# Altium PCB IR_Sensor.PcbDoc
Units mil, origin at the board's own origin, x right, y up, seen from the top; angles counter-clockwise.
Board outline 1596.57 x 1682.66 mil, 4 copper layers (Top Layer, GND, PWR, Bottom Layer), stack 61.583 mil thick; 53 components, 41 nets, 214 pads, 265 vias.
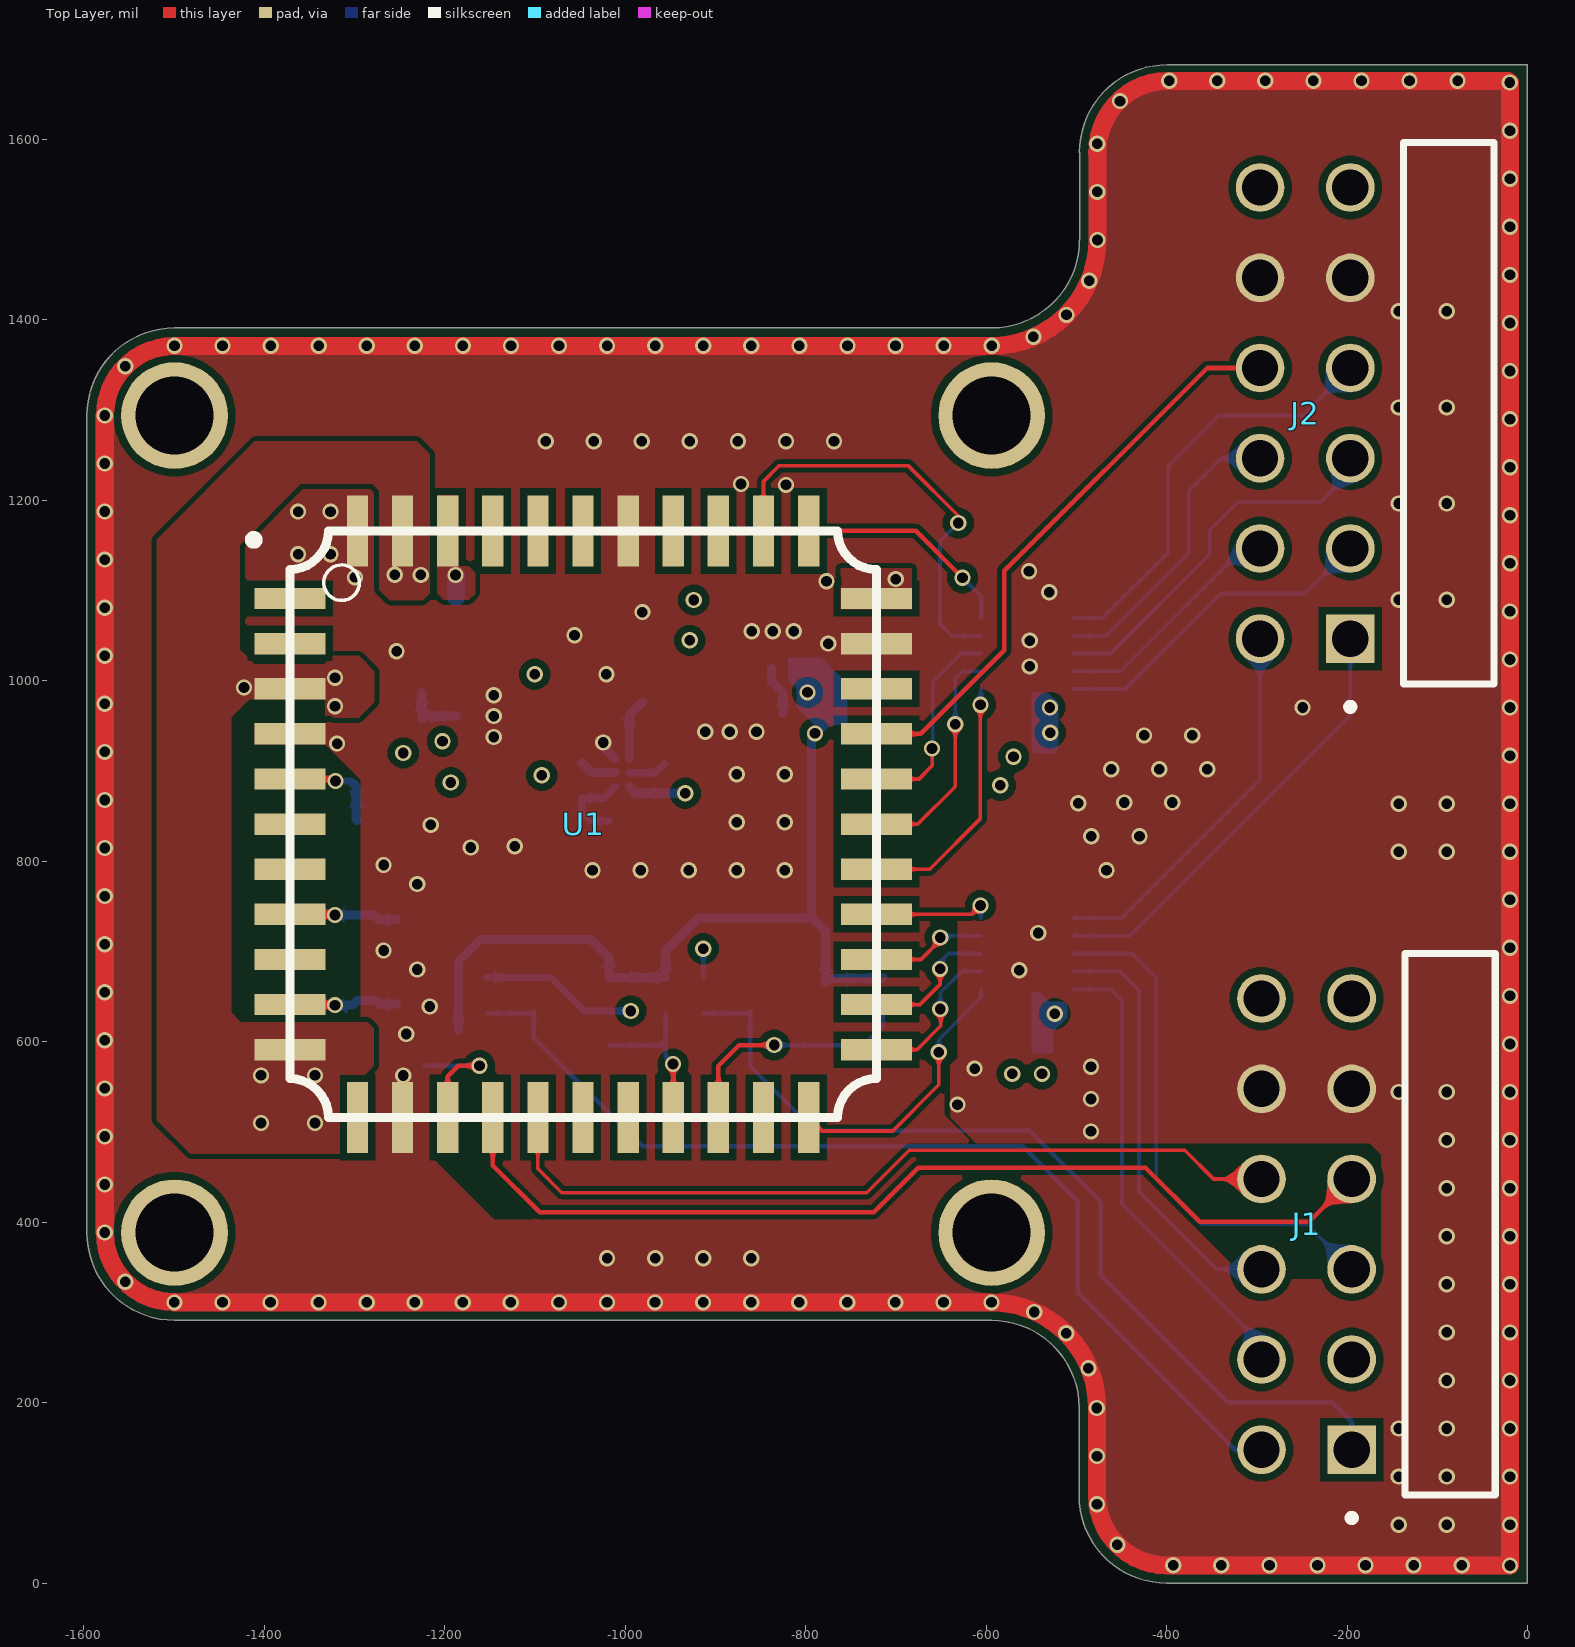
[diagram p0: Top Layer view]
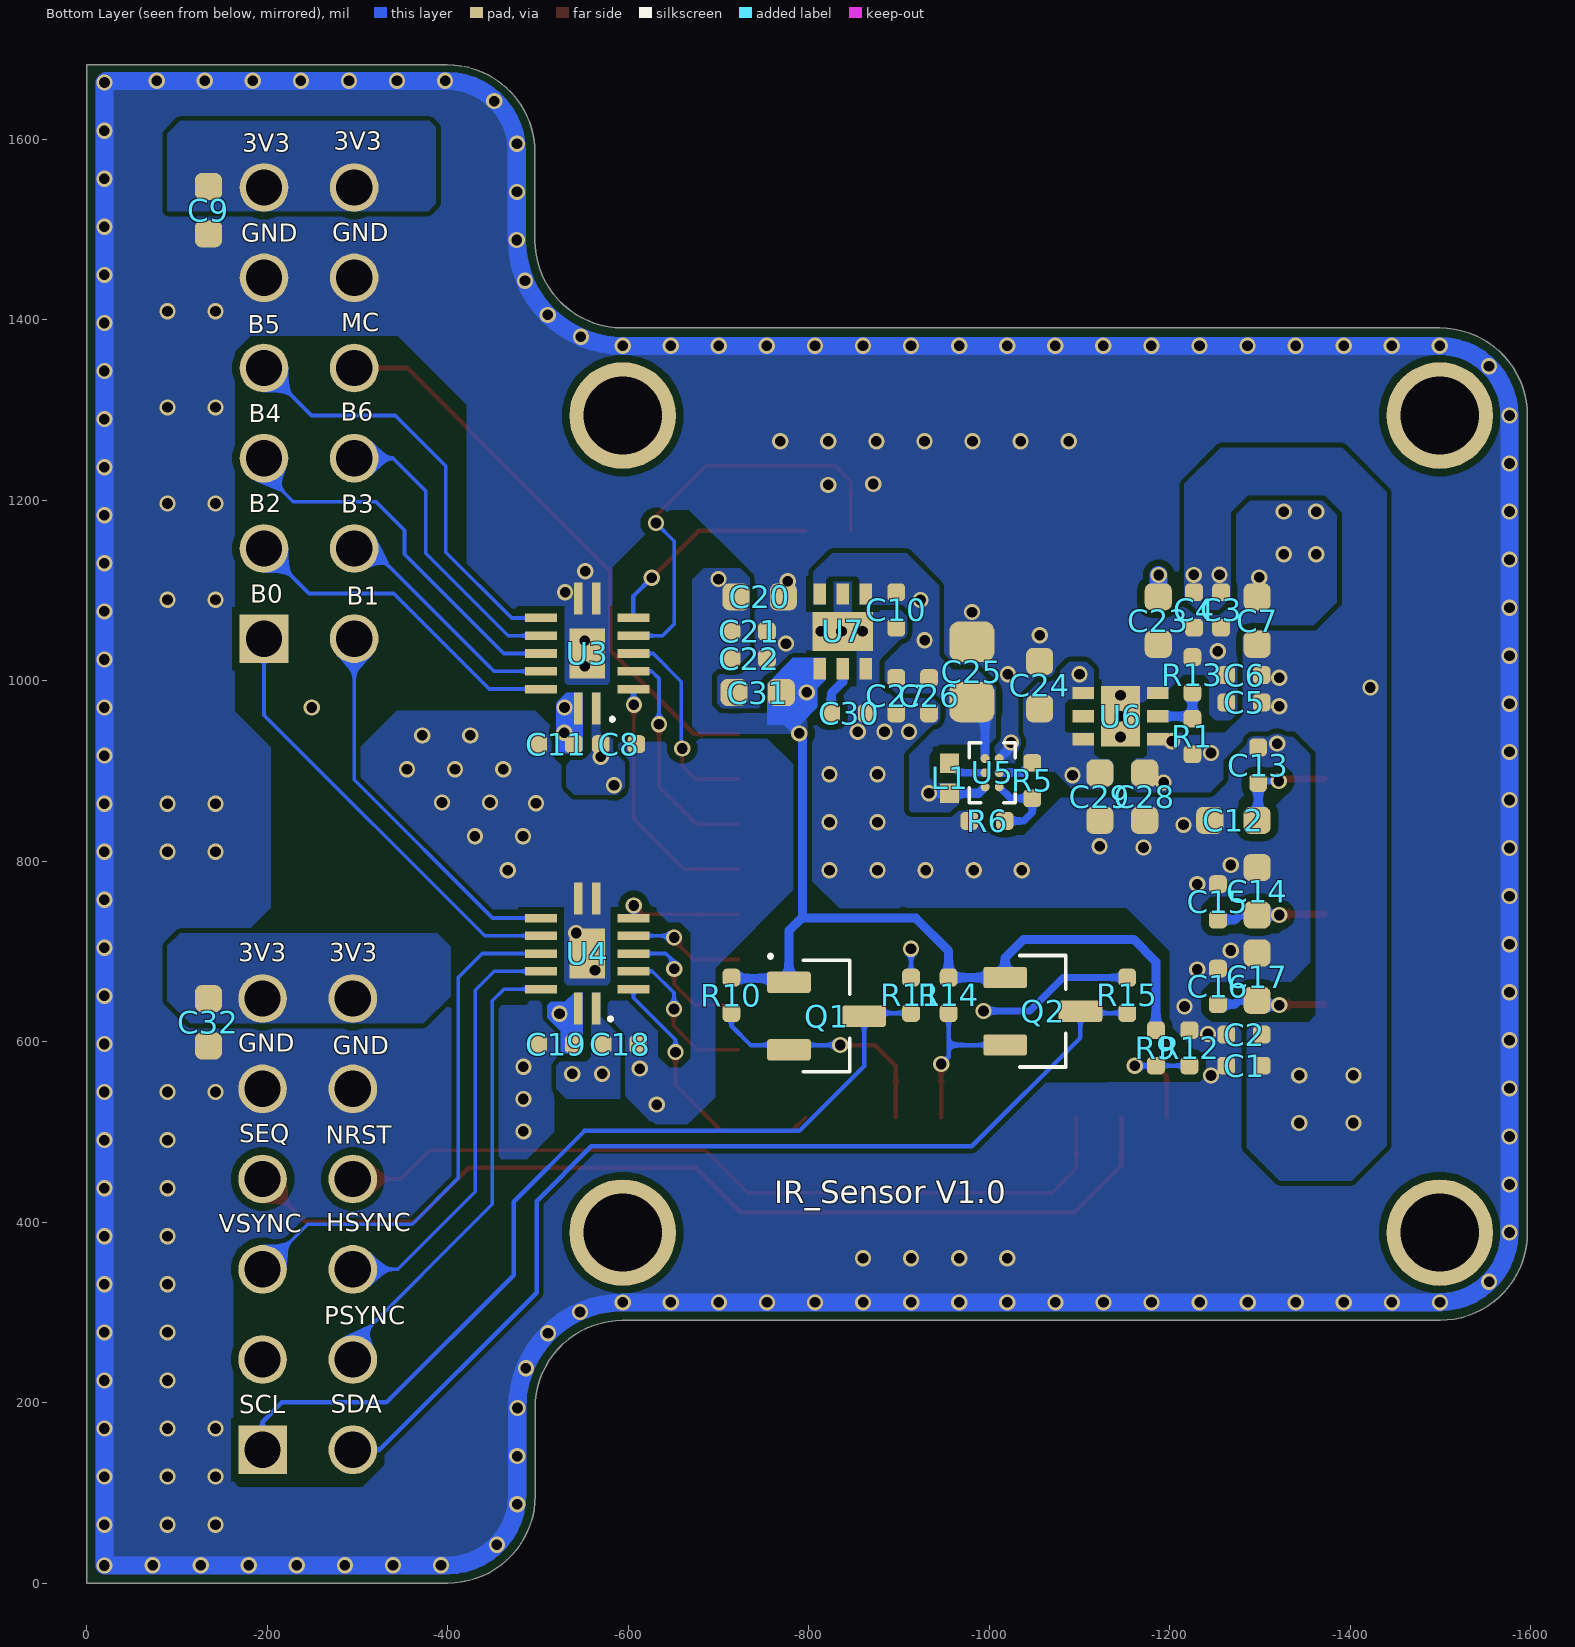
[diagram p1: Bottom Layer view, seen from below]
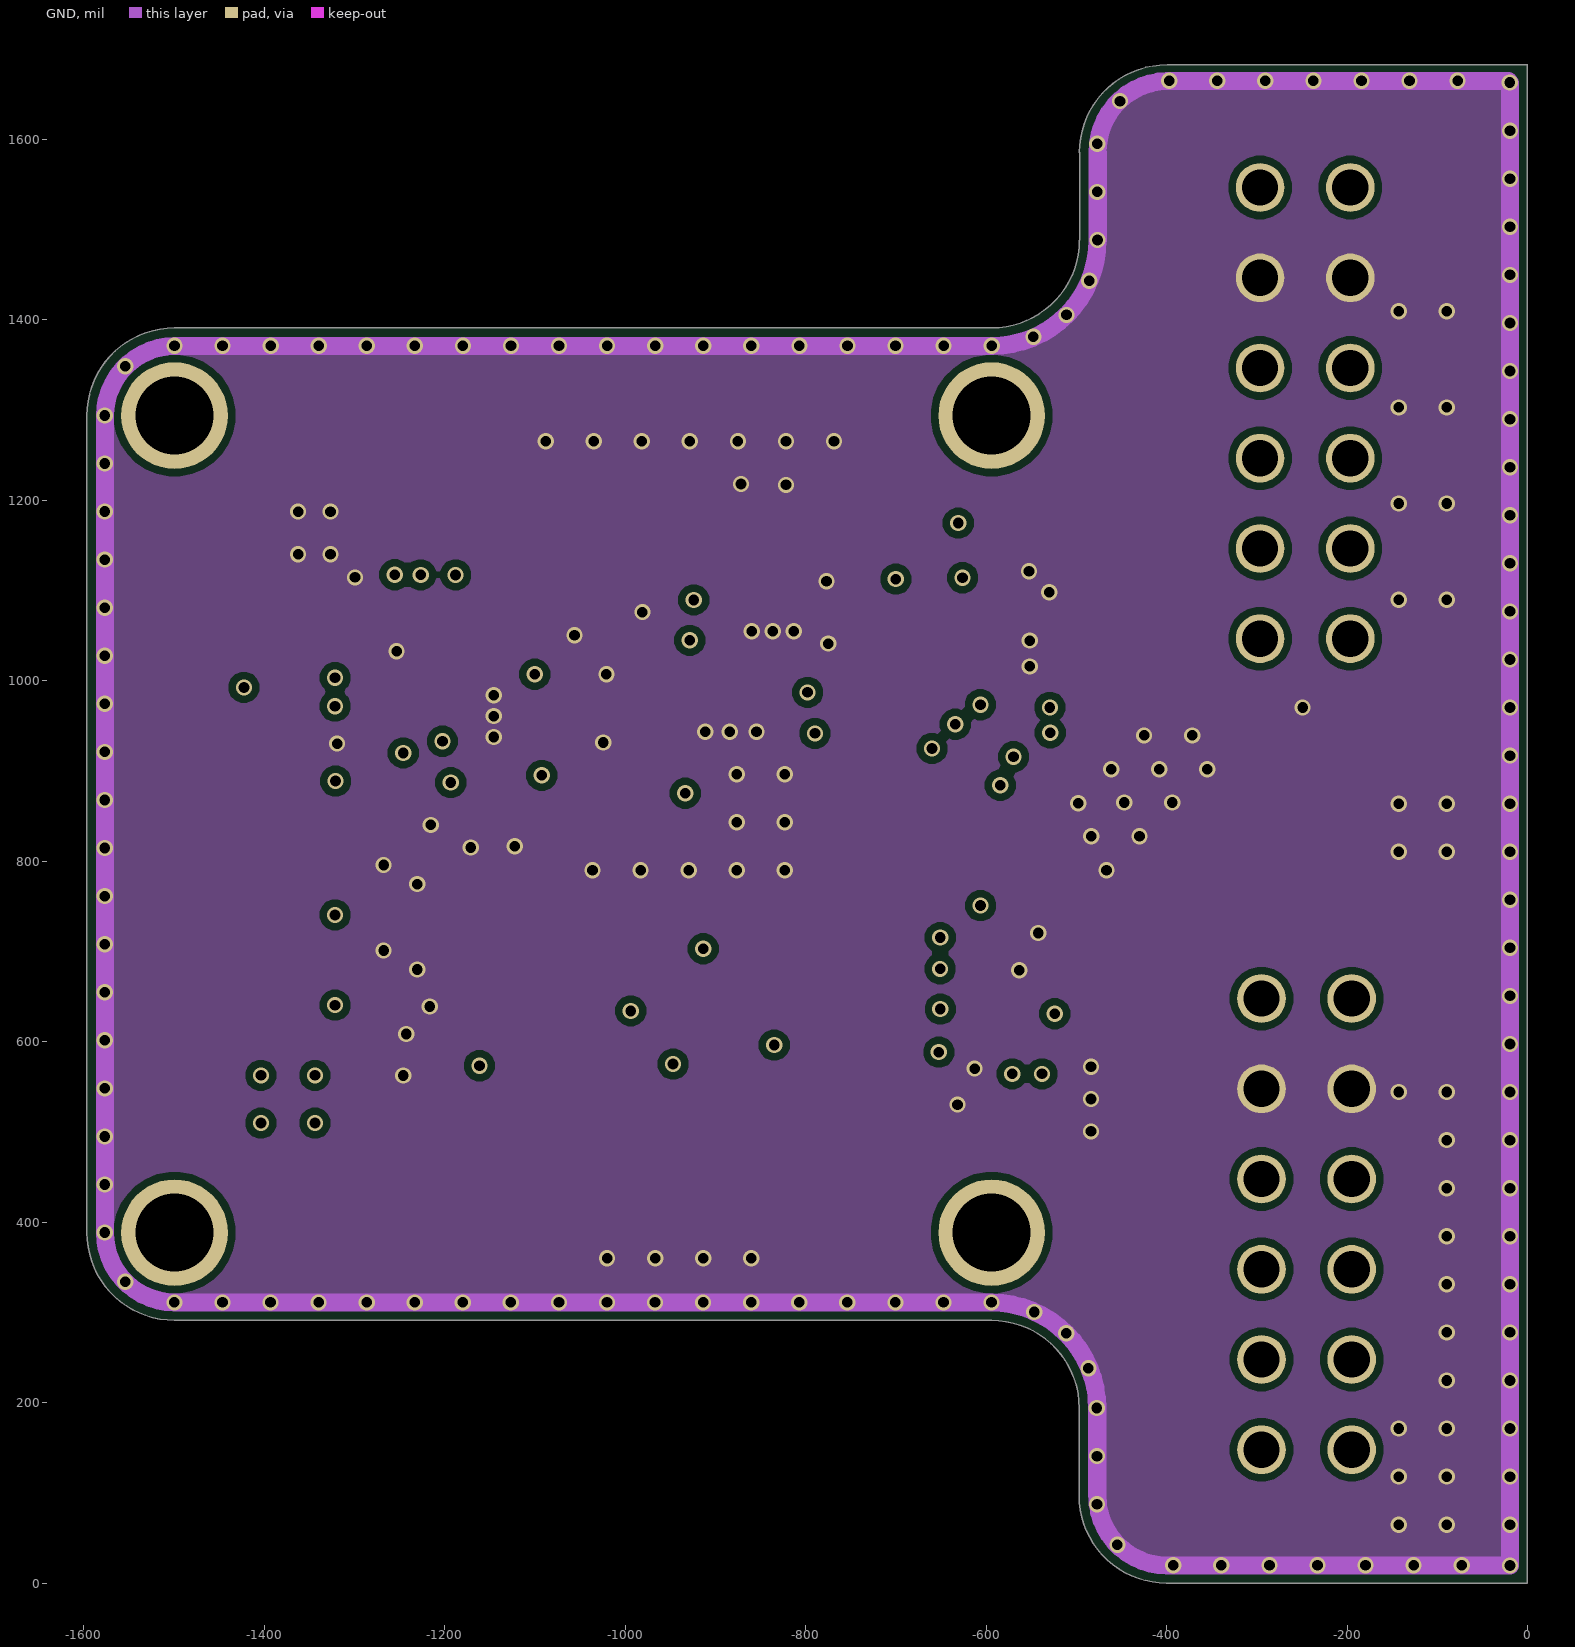
[diagram p2: GND]
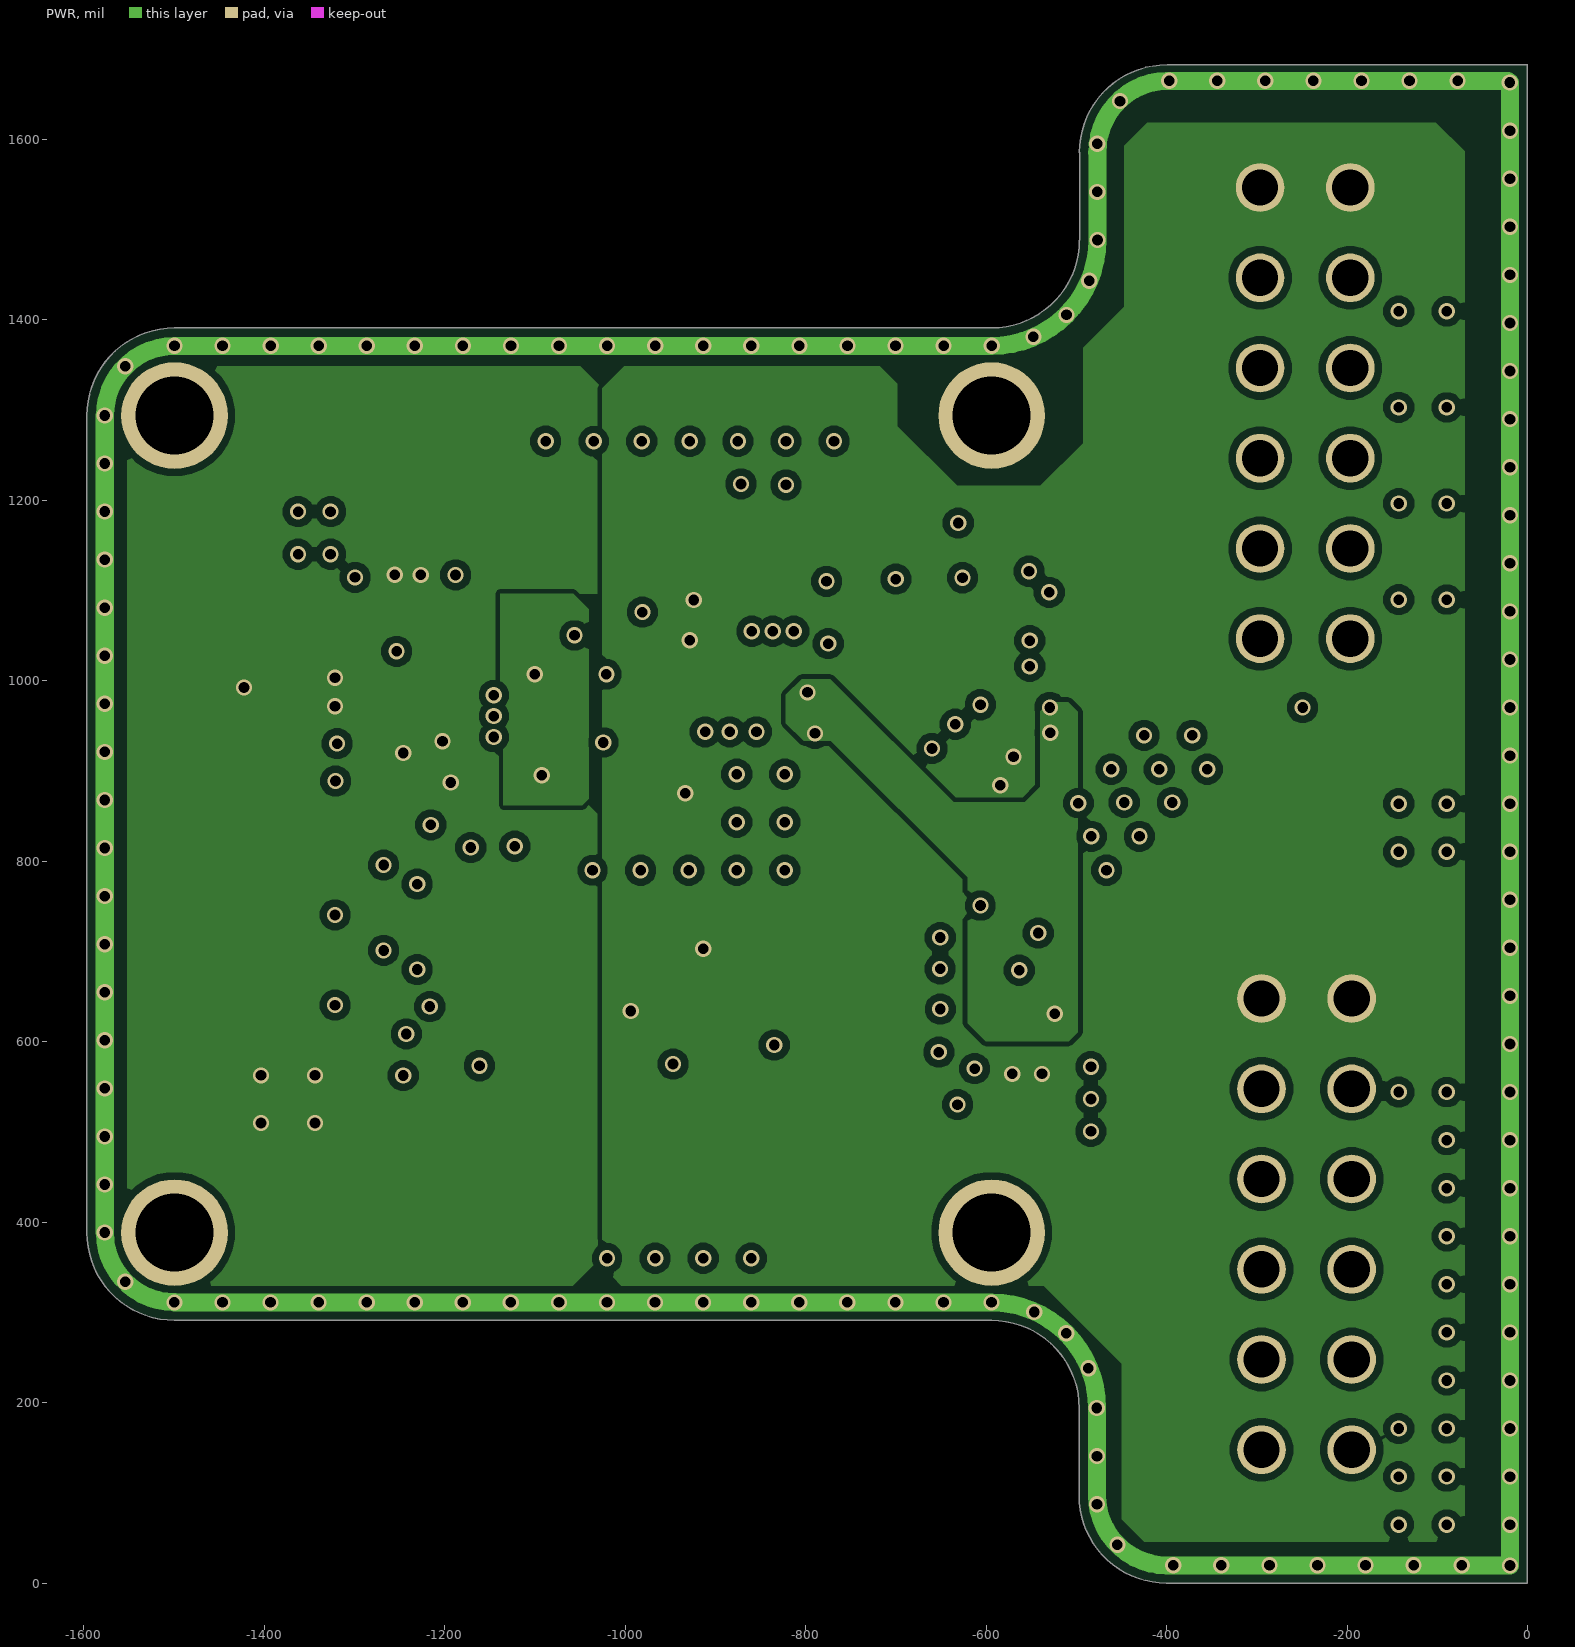
[diagram p3: PWR]
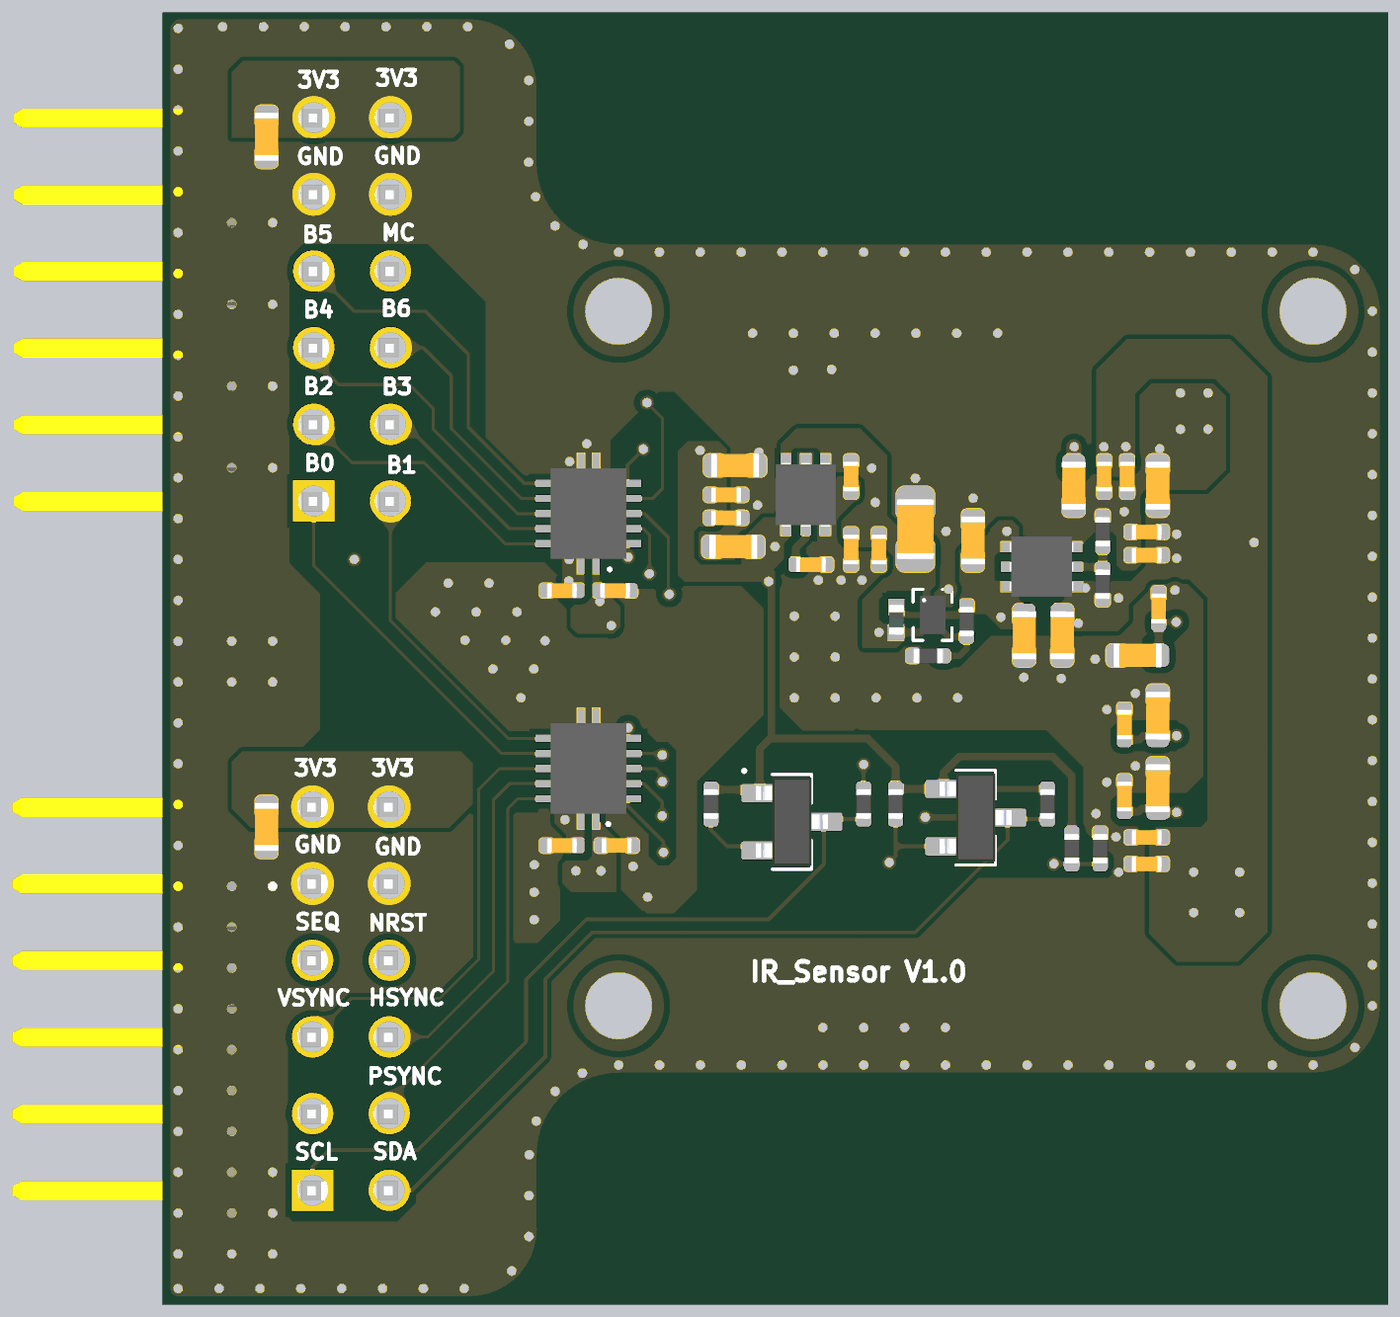
[diagram p4: 3D render of the assembled board from below, using the file's embedded part models]

## Layer stack, top to bottom
Top Solder: solder mask 0.4, Solder Resist, Dk 3.5
Top Layer: signal copper 1.378
Dielectric 2: prepreg 3.9134, PP-006, Dk 4.1
GND: signal copper 0.5984
Dielectric1: dielectric 49.8031, FR-4, Dk 4.8
PWR: signal copper 0.5984
Dielectric3: dielectric 3.9134, FR-4, Dk 4.29
Bottom Layer: signal copper 1.378
Bottom Solder: solder mask 0.4, Solder Resist, Dk 3.5

## Board outline
-1596.5,388.54 ccw(c-1499.4,388.47) -1499.47,291.37 -593.96,291.37 -593.82,291.23 cw(c-593.89,194.13) -496.79,194.06 -496.79,96.89 -496.92,97.17 ccw(c-399.82,97.1) -399.89,0 0,0 0,1682.51 -0.15,1682.66 -399.41,1682.66 ccw(c-399.48,1585.56) -496.58,1585.63 -496.44,1585.76 -496.44,1488.59 -496.54,1488.23 cw(c-593.64,1488.3) -593.7,1391.2 -594.02,1391.01 -1499.4,1391.01 ccw(c-1499.47,1293.91) -1596.57,1293.98

## Design rules (kind name [scope] priority, off if disabled: settings)
BoardOutlineClearance [All] p1: gap=6 ignorepadtopadclearanceinfootprint=FALSE
Clearance [All] p1: gap=5 ignorepadtopadclearanceinfootprint=TRUE except(8: SMDPad-Poly THPad-Poly Via-Fill Via-Poly Via-Region)
MinimumSolderMaskSliver [All] p1: minsoldermaskwidth=0
PolygonConnect [All] p1: connectstyle=Direct reliefconductorwidth=10 reliefentries=4 polygonreliefangle="90 Angle" airgapwidth=10
RoutingVias [All] p1: holewidth=11.81 width=17.99 viastyle="Through Hole" minholewidth=11.81 minwidth=17.99 maxholewidth=11.81 maxwidth=17.99
SilkToSilkClearance SilkToSilkClearance_1 [All] p1: silktosilkclearance=0
SilkToSolderMaskClearance [IsPad] p1: minsilkscreentomaskgap=0 clearancetoexposedcopper=TRUE
SolderMaskExpansion [All] p1: expansion=1 istentingtop=FALSE
UnRoutedNet [All] p1: checkbadconnections=TRUE
ViasUnderSMD [All] p1: allowed=TRUE
Width [All] p1: maxlimit=200 minlimit=4 preferedwidth=4
26 further rules are at their usual default settings.

## Components (designator, comment, footprint, x,y, rotation, side; value= is the part's Value field where it differs from the comment)
C1 "Cap" CAPC0402 -1282.44,573.51 r0 bottom value=1nF
C2 "Cap" CAPC0402 -1282.44,607.99 r0 bottom value=0.1uF
C3 "Cap" CAPC0402 -1257.03,1078.49 r270 bottom value=1nF
C4 "Cap" CAPC0402 -1227.03,1078.49 r270 bottom value=0.1uF
C5 "Cap" CAPC0402 -1282.44,976.01 r0 bottom value=1nF
C6 "Cap" CAPC0402 -1282.44,1006.42 r0 bottom value=0.1uF
C7 "Cap" CAPC0603 -1296.96,1066.76 r270 bottom value=22uF
C8 "Cap" CAPC0402 -589.28,929.84 r180 bottom value=0.1uF
C9 "Cap" CAPC0603 -134.78,1521.61 r90 bottom value=22uF
C10 "Cap" CAPC0402 -896.98,1078.49 r270 bottom value=1uF
C11 "Cap" CAPC0402 -519.99,929.84 r0 bottom value=0.1uF
C12 "Cap" CAPC0603 -1270.7,845.33 r0 bottom value=22uF
C13 "Cap" CAPC0402 -1298.12,906.51 r270 bottom value=0.1uF
C14 "Cap" CAPC0603 -1296.96,766.78 r90 bottom value=22uF
C15 "Cap" CAPC0402 -1253.48,755.04 r270 bottom value=0.1uF
C16 "Cap" CAPC0402 -1253.48,661.4 r270 bottom value=0.1uF
C17 "Cap" CAPC0603 -1296.96,672.13 r90 bottom value=22uF
C18 "Cap" CAPC0402 -591.43,597.33 r180 bottom value=0.1uF
C19 "Cap" CAPC0402 -519.99,597.33 r0 bottom value=0.1uF
C20 "Cap" CAPC0603 -745.73,1093.02 r0 bottom value=4.7uF
C21 "Cap" CAPC0402 -734,1054.69 r180 bottom value=0.1uF
C22 "Cap" CAPC0402 -734,1024.69 r180 bottom value=1nF
C23 "Cap" CAPC0603 -1187.37,1066.76 r90 bottom value=4.7uF
C24 "Cap" CAPC0603 -1055.98,995.28 r90 bottom value=22uF
C25 "Cap" CAPC0805 -980.91,1010.01 r270 bottom value=100uF
C26 "Cap" CAPC0402 -933.38,983.55 r270 bottom value=0.1uF
C27 "Cap" CAPC0402 -896.98,983.55 r270 bottom value=1nF
C28 "Cap" CAPC0603 -1172.37,871.59 r90 bottom value=22uF
C29 "Cap" CAPC0603 -1122.64,871.59 r90 bottom value=22uF
C30 "Cap" CAPC0402 -844.7,963.87 r180 bottom value=0.1uF
C31 "Cap" CAPC0603 -743.46,987.03 r0 bottom value=22uF
C32 "Cap" CAPC0603 -134.78,621.61 r90 bottom value=22uF
J1 "Header 10X1_2.54MM_1" SAMTEC_HTSW-106-08-L-D-RA -85.73,397.87 r90 top locked
J2 "Header 10X1_2.54MM_1" SAMTEC_HTSW-106-08-L-D-RA -87.28,1296.67 r90 top locked
L1 "Inductor" IND_0402 -956.17,891.91 r270 bottom value=2.2uH
Q1 "MOSFET-N Si2302CDS" BSS138 -819.81,628.42 r180 bottom
Q2 "MOSFET-N Si2302CDS" BSS138 -1059.45,633.79 r180 bottom
R1 "Resistor" RESC0402 -1225.18,938.25 r270 bottom value=1.13M
R5 "Resistor" RESC0402 -1047.75,889.44 r270 bottom value=806K
R6 "Resistor" RESC0402 -997.61,844.69 r180 bottom value=249K
R9 "Resistor" RESC0402 -1184.83,593.19 r270 bottom value=0E
R10 "Resistor" RESC0402 -714.31,651.51 r270 bottom value=2.2K
R11 "Resistor" RESC0402 -913.39,651.51 r270 bottom value=2.2K
R12 "Resistor" RESC0402 -1221.96,593.19 r90 bottom value=0E
R13 "Resistor" RESC0402 -1225.18,1006.64 r270 bottom value=324K
R14 "Resistor" RESC0402 -955.06,651.51 r270 bottom value=2.2K
R15 "Resistor" RESC0402 -1153.02,651.51 r270 bottom value=2.2K
U1 "Atto320-058" CQFP130P1823X1823X336-44N -1046.64,841.23 r0 top locked
U3 "FXL5T244BQX" FXL5T244BQX -554.64,1030.28 r90 bottom
U4 "FXL5T244BQX" FXL5T244BQX -554.64,697.77 r90 bottom
U5 "TPS61099YFFT" "BGA TPS61099YFFT" -1003.3,898.14 r180 bottom
U6 "TPS71701QDRVRQ1" SON65P200X200X80-7N -1145.48,960.88 r0 bottom
U7 "TPS71718QDRVRQ1" SON65P200X200X80-7N -837.76,1054.87 r90 bottom

## Footprints (in the part's own frame and the unit in brackets; to place one, negate y for a bottom-side part, rotate by r counter-clockwise, add the part's x,y. Pads: shape width x height; smd on the part's side, far side on the other; paste and mask are expansions set on the pad)
"BGA TPS61099YFFT" [mm]
  round 0.25 smd: 1(0.2,0.4) 2(0.2,0) 3(0.2,-0.4) 4(-0.2,-0.4) 5(-0.2,0) 6(-0.2,0.4)
  silkscreen extent -0.64,-0.84 0.64,0.84, body extent -0.43,-0.63 0.43,0.63, height 0.63
BSS138 [mm]
  rrect25% 1.23x0.6 smd: 1(-1.06,0.95) 2(-1.06,-0.95) 3(1.06,0)
  silkscreen extent -1.58,-1.57 0.65,1.68, body extent -1.2,-1.46 1.2,1.46, height 1.2
CAPC0402 [mm]
  rrect50% 0.5x0.5 smd: 1(-0.5,0) 2(0.5,0)
  body extent -0.5,-0.25 0.5,0.25, height 0.42
CAPC0603 [mil]
  rrect50% 30x30 smd: 1(-26.26,0) 2(26.26,0)
  body extent -31,-16 31,16, height 34
CAPC0805 [mm]
  rrect50% 1.14x1.27 smd: 1(-0.852,0) 2(0.852,0)
  body extent -1,-0.63 1,0.63, height 0.82
CQFP130P1823X1823X336-44N [mm] "CQFP, 44-Leads, Body 18.23x18.23mm, Pitch 1.30mm, IPC Medium Density"
  rect 2x0.6 smd: 1(-8.255,6.35) 2(-8.255,5.08) 3(-8.255,3.81) 4(-8.255,2.54) 5(-8.255,1.27) 6(-8.255,0) 7(-8.255,-1.27) 8(-8.255,-2.54) 9(-8.255,-3.81) 10(-8.255,-5.08) 11(-8.255,-6.35) 23(8.255,-6.35) 24(8.255,-5.08) 25(8.255,-3.81) 26(8.255,-2.54) 27(8.255,-1.27) 28(8.255,0) 29(8.255,1.27) 30(8.255,2.54) 31(8.255,3.81) 32(8.255,5.08) 33(8.255,6.35)
  rect 0.6x2 smd: 12(-6.35,-8.255) 13(-5.08,-8.255) 14(-3.81,-8.255) 15(-2.54,-8.255) 16(-1.27,-8.255) 17(0,-8.255) 18(1.27,-8.255) 19(2.54,-8.255) 20(3.81,-8.255) 21(5.08,-8.255) 22(6.35,-8.255) 34(6.35,8.255) 35(5.08,8.255) 36(3.81,8.255) 37(2.54,8.255) 38(1.27,8.255) 39(0,8.255) 40(-1.27,8.255) 41(-2.54,8.255) 42(-3.81,8.255) 43(-5.08,8.255) 44(-6.35,8.255)
  silkscreen extent -9.4,-8.25 8.25,8.25, body extent -8.25,-8.25 8.25,8.25, height 3.36
FXL5T244BQX [mm]
  rect 0.9x0.24 smd: 1(-1.55,-0.25) 7(1.55,-0.25) 8(1.55,0.25) 14(-1.55,0.25)
  rect 0.24x0.9 smd: 2(-1,-1.3) 3(-0.5,-1.3) 4(0,-1.3) 5(0.5,-1.3) 6(1,-1.3) 9(1,1.3) 10(0.5,1.3) 11(0,1.3) 12(-0.5,1.3) 13(-1,1.3)
  rect 1.4x1 smd: 15(0,0)
  silkscreen extent -1.9,-0.75 -1.8,-0.65, body extent -1.5,-1.25 1.5,1.25, height 0.9
IND_0402 [mm]
  rect 0.55x0.53 smd: 1(0.419,0) 2(-0.419,0)
  body extent -0.5,-0.25 0.5,0.25, height 0.55
RESC0402 [mm]
  rrect50% 0.5x0.5 smd: 1(0.5,0) 2(-0.5,0)
  body extent -0.5,-0.25 0.5,0.25, height 0.4
SAMTEC_HTSW-106-08-L-D-RA [mm]
  rect 1.37x1.37 / inner round 1.37 / far side rect 1.37x1.37 hole 1.02: 1(-6.35,2.77)
  round 1.37 hole 1.02: 2(-6.35,5.31) 3(-3.81,2.77) 4(-3.81,5.31) 5(-1.27,2.77) 6(-1.27,5.31) 7(1.27,2.77) 8(1.27,5.31) 9(3.81,2.77) 10(3.81,5.31) 11(6.35,2.77) 12(6.35,5.31)
  silkscreen extent -8.37,-1.27 7.62,2.87, body extent -7.64,-7.17 7.6,5.6, height 6.1
SON65P200X200X80-7N [mm]
  rect 0.6x0.35 smd: 1(-1.05,0.65) 2(-1.05,0) 3(-1.05,-0.65) 4(1.05,-0.65) 5(1.05,0) 6(1.05,0.65)
  rect 1.1x1.7 smd: 7(0,0)
  body extent -1.05,-1 1.05,1, height 0.8

## Part data
C1 C3 C5 C22 C27: "Ceramic Capacitor,1nF, 0402,16V,X7R,10%", Case/Package=0402, dielectric=X7R, Voltage=16V
C2 C8 C11 C13 C15 C16 C18 C19 C21 C26 C30: "Ceramic Capacitor,0.1uF,16V,X7R, 0402,10%", Case/Package=0402, dielectric=X7R, Voltage=16V
C4 C6: "Ceramic Capacitor,0.1uF, 0402", Case/Package=0402, dielectric=X5R, Voltage=16v
C7 C9 C12 C14 C17 C24 C28 C29 C32: "Ceramic Capacitor,22uF, 0603, 25V,X7R,10%", Case/Package=0603, dielectric=X7R, Voltage=25V
C10: "Ceramic Capacitor,1uF, 0402", Case/Package=0402, dielectric=X5R, Voltage=16V
C20 C23: "Ceramic Capacitor,4.7uF, 0603,25V", Case/Package=0603, dielectric=X5R, Voltage=25V
C25: "Ceramic Capacitor,16V, 100uF, X5R, 0805, 10%", Case/Package=0805, dielectric=X5R, Voltage=16V
C31: "Ceramic Capacitor,22uF, 0402, 25V", Case/Package=0603, dielectric=X7R, Voltage=25V
J1 J2: Case/Package=TH, Manufacturer Part Number="TH 2.54MM"
L1: "2.2uH 1.3A 210mOhms", Case/Package=0806, Current=1.3A, Manufacturer Part Number=74479876222C
Q1 Q2: library part bss138_1, "N-Channel 50 V 220mA (Ta) 350mW (Ta) Surface Mount SOT-23", Case/Package="TO-236-3, SC-59, SOT-23-3", Manufacturer Part Number=BSS138
R1: "Thick Film Resistor -  1.13M, 1%, 0402", Case/Package=0402
R5: "Thick Film Resistor -  806K, 1%, 0402", Case/Package=0402
R6: "Thick Film Resistor -  249KK, 1%, 0402", Case/Package=0402
R9 R12: "Thick Film Resistor -  0E, 1%, 0402", Case/Package=0402
R10 R11 R14 R15: "Thick Film Resistor -  2.2k, 1%, 0402", Case/Package=0402
R13: "Thick Film Resistor -  324K, 1%, 0402", Case/Package=0402
U1: "tharmal image sensor Atto320-015", Case/Package="J-LEAD 44", Manufacturer Part Number=ATTO320-058
U3 U4: "Voltage Level Translator Unidirectional 1 Circuit 5 Channel 14-DQFN (3x2.5)", Case/Package="14-VFQFN Exposed Pad", Manufacturer Part Number=FXL5T244BQX
U5: "Boost Switching Regulator IC Positive Adjustable 1.8V 1 Output 800mA (Switch) 6-UFBGA, DSBGA", Case/Package="6-UFBGA, DSBGA", Manufacturer Part Number=TPS61099YFFT
U6: "Linear Voltage Regulator IC Positive Adjustable 1 Output 150mA 6-WSON (2x2)", Case/Package="6-WSON (2x2)", Manufacturer_Part_Number=TPS71701QDRVRQ1
U7: "Linear Voltage Regulator IC Positive Fixed 1 Output 150mA 6-WSON (2x2)", Case/Package="6-WDFN Exposed Pad", Manufacturer Part Number=TPS71718QDRVRQ1

## Free pads (board coordinates)
  round 118.11 hole 86.61 mask+1: 2(-1499.4,388.47) 2(-1499.4,1293.98) 2(-593.89,388.47) 2(-593.89,1293.98)

## Via types
v1: diameter 17.99, hole 11.81, Top Layer to Bottom Layer, tented both sides, 265 vias

## Nets (pads, with @x,y where several pads share a name; then routed paths per layer and width w, separated by ;. In a path a pad name is that pad's centre, name@x,y a point inside that pad or via, vN(x,y) a via of type N, cw(c..) or ccw(c..) an arc to the next point about the centre after c; other vN are vias at no path point)
1.8V: C11.1 C19.1 C20.2 C21.1 C22.1 C31.1 Q1.1 Q2.1 R9.2 R10.2 R14.2 U1.33 U3.14 U4.14 U7.1 | length 1022.9
  Bottom Layer w10: R9.2 -1184.83,688.55 -1159.99,713.39 -1038.22,713.39 -1017.72,692.89 Q2.1 R14.2 -955.06,700.6 -918.69,736.97 -793.43,736.97 -792.03,736.97 -778.08,723.02 Q1.1 ; U7.1 -810.82,1014.88 -779.38,1014.88 -767.96,1003.47 -767.96,988.79 C31.1 ; -793.21,736.97 -793.21,941.56 -793.03,941.74 v1(-789.62,941.74) -788.78,941.74 -770.13,960.39 C31.1@-770.13,986.62 ; Q1.1@-778.08,670.21 -715.3,670.21 R10.2
  other v1: -523.86,631.12 -528.98,942.48 -529.28,970.5 -797.83,987.17 -700.01,1112.7
3.3V: C8.1 C9.2 C10.1 C18.1 C25.2 C26.1 C27.1 C32.2 J1.11 J1.12 J2.11 J2.12 L1.1 R11.2 R15.2 U3.1 U4.1 U5.4 U5.6 U7.4 U7.6 | length 340.1
  Bottom Layer w5: R11.2 v1(-913.39,703.09)
  Bottom Layer w8: R15.2 -1082.09,671.2 -1045.06,634.17 v1(-993.71,634.17)
  Bottom Layer w10: U5.4 -988.45,875.41 L1.1 v1(-933.38,875.41) ; U5.6 -995.43,961.94 C25.2
  other v1: -571.02,564.38 -538.01,564.38 -584.27,884.18 -569.59,915.89 -928.46,1044.85 -923.93,1089.61
3.6V: C1.1 C2.1 C3.1 C4.1 C5.1 C6.1 C7.2 C28.2 R1.1 U1.3 U1.11 U1.43 U6.1
  other v1: -1403.62,509.94 -1343.72,509.94 -1403.62,562.73 -1343.72,562.73 -1193.28,887.27 -1245.91,920.06 -1202.42,933.07 -1321.5,971.95 -1422.46,992.61 -1321.5,1003.42 -1255.31,1117.58 -1226.59,1117.42
4.2V: C24.1 C29.2 R5.2 U5.2 U6.4 U6.6 | length 41.1
  Bottom Layer w10: R5.2 -1036.77,898.14 U5.2
  other v1: -1092.33,895.23 -1100.11,1007.21
B0IN: U1.25 U4.5 | length 128.7
  Top Layer w4: U1.25 -672.08,691.23 -650.82,712.49 v1(-650.82,715.54)
  Bottom Layer w4: v1(-650.82,715.54) -650.82,715.96 -649.32,717.46 U4.5
B0OUT: J2.1 U4.10 | length 493.9
  Bottom Layer w4: U4.10 U4.10@-501.45,719.46 ; U4.10@-501.45,717.46 -440.88,717.46 -196.34,961.99 J2.1
B1IN: U1.26 U4.6 | length 133.4
  Top Layer w4: U1.26 -615.89,741.23 v1(-606.17,750.94)
  Bottom Layer w4: v1(-606.17,750.94) -605.82,750.58 U4.6
B1OUT: J2.2 U4.9 | length 427.7
  Bottom Layer w4: U4.9 U4.9@-501.45,739.14 ; U4.9@-501.45,737.14 -449.63,737.14 -296.34,890.43 J2.2
B2IN: U1.27 U3.2 | length 280.4
  Top Layer w4: U1.27 -662.39,791.23 -606.26,847.35 v1(-606.26,973.56)
  Bottom Layer w4: U3.2 -605.82,976.12 v1@-605.26,975.56
B2OUT: J2.3 U3.13 | length 371.6
  Bottom Layer w4: U3.13 -445.97,990.91 -340.09,1096.79 -246.22,1096.79 J2.3
B3IN: U1.28 U3.3 | length 256.1
  Top Layer w4: U1.28 -675.63,841.23 -634.1,882.75 v1@-634.1,951.77
  Bottom Layer w4: v1(-634.08,951.79) -634.08,1002.47 -625.96,1010.6 U3.3
B3OUT: J2.4 U3.12 | length 263.5
  Bottom Layer w4: U3.12 -451.28,1010.6 -315.2,1146.67 J2.4
B4IN: U1.29 U3.4 | length 226
  Top Layer w4: U1.29 -674.36,891.23 -659.85,905.74 v1@-659.85,929.96
  Bottom Layer w4: v1@-658.91,931.02 -658.91,998.95 -627.58,1030.28 U3.4
  other v1: -659.91,925.02
B4OUT: J2.5 U3.11 | length 421.7
  Bottom Layer w4: U3.11 -462.03,1030.28 -352.1,1140.21 -352.1,1166.94 -320.58,1198.46 -228.73,1198.46 -196.34,1230.85 J2.5
B5IN: U1.34 U3.6 | length 245.5
  Top Layer w5: U1.34 -678.04,1166.23 v1(-626.13,1114.31)
  Bottom Layer w5: v1(-626.13,1114.31) -605.32,1093.5 -605.32,1070.15 U3.6
B5OUT: J2.7 U3.9 | length 477.7
  Bottom Layer w4: U3.9 -470.9,1069.65 -397.93,1142.62 -397.93,1237.97 -341.92,1293.98 -249.03,1293.98 -236.34,1306.67 J2.7
B6IN: U1.35 U3.5 | length 479.8
  Top Layer w4: U1.35 -846.64,1221 -829.08,1238.56 -686.45,1238.56 -630.81,1182.92 v1(-630.81,1174.89)
  Bottom Layer w4: v1(-630.81,1174.89) -651.02,1154.69 -651.02,1063 -637.99,1049.97 U3.5
B6OUT: J2.6 U3.10 | length 329
  Bottom Layer w4: U3.10 -467.11,1049.97 -375.58,1141.49 -375.58,1210.41 -339.32,1246.67 J2.6
GFID: C16.2 C17.1 U1.10 | length 122.6
  Top Layer w8: U1.10 -1322.92,641.23 v1@-1321.5,642.65
  Bottom Layer w10: v1(-1321.5,640.65) -1302.18,640.65 C17.1 -1276.34,645.87 -1272.18,641.71 C16.2
GND: C1.2 C2.2 C3.2 C4.2 C5.2 C6.2 C7.1 C8.2 C9.1 C10.2 C11.2 C12.2 C13.1 C14.2 C15.1 C16.1 C17.2 C18.2 C19.2 C20.1 C21.2 C22.2 C23.1 C24.2 C25.1 C26.2 C27.2 C28.1 C29.1 C30.2 C31.2 C32.1 J1.9 J1.10 J2.9 J2.10 R6.2 R12.1 R13.2 U1.4 U1.13 U1.32 U1.38 U1.44 U3.7 U3.8 U3.15 U4.7 U4.8 U4.15 U5.1 U6.3 U6.7 U7.3 U7.5 U7.7 | length 24704.1
  Top Layer w20: v1(-1576.71,388.54) v1(-1576.71,441.81) v1(-1576.71,495.08) v1(-1576.71,548.35) v1(-1576.71,601.62) v1(-1576.71,654.89) v1(-1576.71,708.16) v1(-1576.71,761.43) v1(-1576.71,814.69) v1(-1576.71,867.96) v1(-1576.71,921.23) v1(-1576.71,974.5) v1(-1576.71,1027.77) v1(-1576.71,1081.04) v1(-1576.71,1134.31) v1(-1576.71,1187.58) v1(-1576.71,1240.85) v1(-1576.71,1294.12) ; v1@-1576.64,388.54 ccw(c-1499.47,388.54) v1@-1499.47,311.37 ; v1@-1576.57,1293.98 cw(c-1499.4,1293.98) -1499.4,1371.15 -647.16,1371.15 v1(-647.09,1371.22) -593.96,1371.22 v1@-593.89,1371.15 ; v1(-1499.54,311.16) v1(-1446.27,311.16) v1(-1393,311.16) v1(-1339.73,311.16) v1(-1286.46,311.16) v1(-1233.19,311.16) v1(-1179.92,311.16) v1(-1126.65,311.16) v1(-1073.38,311.16) v1(-1020.11,311.16) v1(-966.84,311.16) v1(-913.57,311.16) v1(-860.3,311.16) v1(-807.03,311.16) v1(-753.76,311.16) v1(-700.49,311.16) v1(-647.23,311.16) v1(-593.96,311.16) cw(c-594.02,194.13) -476.99,194.06 -476.99,97.31 ; v1(-593.82,1371.22) ccw(c-593.96,1488.46) v1@-476.72,1488.59 ; -477.13,97.17 -476.99,97.31 ; -476.86,1585.63 -476.66,1585.43 ; v1(-476.46,1488.48) -476.46,1585.23 -476.66,1585.43 ; v1@-19.65,19.79 v1(-72.92,19.79) v1(-126.19,19.79) v1(-179.46,19.79) v1(-232.73,19.79) v1(-286,19.79) v1(-339.27,19.79) v1(-392.54,19.79) -399.89,19.79 cw(c-399.69,97.1) -476.99,97.31 ; v1(-19.44,19.59) v1(-19.44,64.84) v1(-19.44,118.11) v1(-19.44,171.38) v1(-19.44,224.65) v1(-19.44,277.92) v1(-19.44,331.19) v1(-19.44,384.46) v1(-19.44,437.73) v1(-19.44,491) v1(-19.44,544.27) v1(-19.44,597.54) v1(-19.44,650.8) v1(-19.44,704.07) v1(-19.44,757.34) v1(-19.44,810.61) v1(-19.44,863.88) v1(-19.44,917.15) v1(-19.44,970.42) v1(-19.44,1023.69) v1(-19.44,1076.96) v1(-19.44,1130.23) v1(-19.44,1183.5) v1(-19.44,1236.77) v1(-19.44,1290.04) v1(-19.44,1343.31) v1(-19.44,1396.58) v1(-19.44,1449.85) v1(-19.44,1503.11) v1(-19.44,1556.38) v1(-19.44,1609.65) -19.44,1662.92 v1(-19.59,1663.07) -21.47,1664.95 -399.41,1664.95 ccw(c-398.28,1586.56) -476.66,1585.43
  GND w20: v1@-1576.5,388.33 v1@-1576.5,1293.91 ; v1@-1576.43,388.33 ccw(c-1499.26,388.33) v1@-1499.26,311.16 ; v1@-1576.36,1293.78 cw(c-1499.19,1293.78) -1499.19,1370.95 -646.95,1370.95 -646.88,1371.01 -593.75,1371.01 v1@-593.68,1370.95 ; v1@-1499.33,310.96 -593.75,310.96 cw(c-593.82,193.93) -476.79,193.86 -476.79,97.1 ; v1@-593.61,1371.01 ccw(c-593.75,1488.25) v1@-476.51,1488.39 ; -476.92,96.96 -476.79,97.1 ; -476.65,1585.42 -476.45,1585.22 ; v1@-476.26,1488.27 -476.26,1585.03 -476.45,1585.22 ; v1(-19.44,19.59) -399.69,19.59 cw(c-399.48,96.9) -476.79,97.1 ; v1@-19.24,19.38 -19.24,1662.72 -21.26,1664.74 -399.21,1664.74 ccw(c-398.07,1586.36) -476.45,1585.22
  PWR w20: v1(-1576.71,388.54) v1(-1576.71,441.81) v1(-1576.71,495.08) v1(-1576.71,548.35) v1(-1576.71,601.62) v1(-1576.71,654.89) v1(-1576.71,708.16) v1(-1576.71,761.43) v1(-1576.71,814.69) v1(-1576.71,867.96) v1(-1576.71,921.23) v1(-1576.71,974.5) v1(-1576.71,1027.77) v1(-1576.71,1081.04) v1(-1576.71,1134.31) v1(-1576.71,1187.58) v1(-1576.71,1240.85) v1(-1576.71,1294.12) ; v1@-1576.64,388.54 ccw(c-1499.47,388.54) v1@-1499.47,311.37 ; v1@-1576.57,1293.98 cw(c-1499.4,1293.98) -1499.4,1371.15 -647.16,1371.15 v1(-647.09,1371.22) -593.96,1371.22 v1@-593.89,1371.15 ; v1(-1499.54,311.16) v1(-1446.27,311.16) v1(-1393,311.16) v1(-1339.73,311.16) v1(-1286.46,311.16) v1(-1233.19,311.16) v1(-1179.92,311.16) v1(-1126.65,311.16) v1(-1073.38,311.16) v1(-1020.11,311.16) v1(-966.84,311.16) v1(-913.57,311.16) v1(-860.3,311.16) v1(-807.03,311.16) v1(-753.76,311.16) v1(-700.49,311.16) v1(-647.23,311.16) v1(-593.96,311.16) cw(c-594.02,194.13) -476.99,194.06 -476.99,97.31 ; v1(-593.82,1371.22) ccw(c-593.96,1488.46) v1@-476.72,1488.59 ; -477.13,97.17 -476.99,97.31 ; -476.86,1585.63 -476.66,1585.43 ; v1(-476.46,1488.48) -476.46,1585.23 -476.66,1585.43 ; v1@-19.65,19.79 v1(-72.92,19.79) v1(-126.19,19.79) v1(-179.46,19.79) v1(-232.73,19.79) v1(-286,19.79) v1(-339.27,19.79) v1(-392.54,19.79) -399.89,19.79 cw(c-399.69,97.1) -476.99,97.31 ; v1(-19.44,19.59) v1(-19.44,64.84) v1(-19.44,118.11) v1(-19.44,171.38) v1(-19.44,224.65) v1(-19.44,277.92) v1(-19.44,331.19) v1(-19.44,384.46) v1(-19.44,437.73) v1(-19.44,491) v1(-19.44,544.27) v1(-19.44,597.54) v1(-19.44,650.8) v1(-19.44,704.07) v1(-19.44,757.34) v1(-19.44,810.61) v1(-19.44,863.88) v1(-19.44,917.15) v1(-19.44,970.42) v1(-19.44,1023.69) v1(-19.44,1076.96) v1(-19.44,1130.23) v1(-19.44,1183.5) v1(-19.44,1236.77) v1(-19.44,1290.04) v1(-19.44,1343.31) v1(-19.44,1396.58) v1(-19.44,1449.85) v1(-19.44,1503.11) v1(-19.44,1556.38) v1(-19.44,1609.65) -19.44,1662.92 v1(-19.59,1663.07) -21.47,1664.95 -399.41,1664.95 ccw(c-398.28,1586.56) -476.66,1585.43
  Bottom Layer w10: v1(-1024.16,931.69) ccw(c-1012.51,931.69) -1020.74,923.46 U5.1
  Bottom Layer w20: v1(-1576.71,388.54) v1(-1576.71,441.81) v1(-1576.71,495.08) v1(-1576.71,548.35) v1(-1576.71,601.62) v1(-1576.71,654.89) v1(-1576.71,708.16) v1(-1576.71,761.43) v1(-1576.71,814.69) v1(-1576.71,867.96) v1(-1576.71,921.23) v1(-1576.71,974.5) v1(-1576.71,1027.77) v1(-1576.71,1081.04) v1(-1576.71,1134.31) v1(-1576.71,1187.58) v1(-1576.71,1240.85) v1(-1576.71,1294.12) ; v1@-1576.64,388.54 ccw(c-1499.47,388.54) v1@-1499.47,311.37 ; v1@-1576.57,1293.98 cw(c-1499.4,1293.98) -1499.4,1371.15 -647.16,1371.15 v1(-647.09,1371.22) -593.96,1371.22 v1@-593.89,1371.15 ; v1(-1499.54,311.16) v1(-1446.27,311.16) v1(-1393,311.16) v1(-1339.73,311.16) v1(-1286.46,311.16) v1(-1233.19,311.16) v1(-1179.92,311.16) v1(-1126.65,311.16) v1(-1073.38,311.16) v1(-1020.11,311.16) v1(-966.84,311.16) v1(-913.57,311.16) v1(-860.3,311.16) v1(-807.03,311.16) v1(-753.76,311.16) v1(-700.49,311.16) v1(-647.23,311.16) v1(-593.96,311.16) cw(c-594.02,194.13) -476.99,194.06 -476.99,97.31 ; v1(-593.82,1371.22) ccw(c-593.96,1488.46) v1@-476.72,1488.59 ; -477.13,97.17 -476.99,97.31 ; -476.86,1585.63 -476.66,1585.43 ; v1(-476.46,1488.48) -476.46,1585.23 -476.66,1585.43 ; v1@-19.65,19.79 v1(-72.92,19.79) v1(-126.19,19.79) v1(-179.46,19.79) v1(-232.73,19.79) v1(-286,19.79) v1(-339.27,19.79) v1(-392.54,19.79) -399.89,19.79 cw(c-399.69,97.1) -476.99,97.31 ; v1(-19.44,19.59) v1(-19.44,64.84) v1(-19.44,118.11) v1(-19.44,171.38) v1(-19.44,224.65) v1(-19.44,277.92) v1(-19.44,331.19) v1(-19.44,384.46) v1(-19.44,437.73) v1(-19.44,491) v1(-19.44,544.27) v1(-19.44,597.54) v1(-19.44,650.8) v1(-19.44,704.07) v1(-19.44,757.34) v1(-19.44,810.61) v1(-19.44,863.88) v1(-19.44,917.15) v1(-19.44,970.42) v1(-19.44,1023.69) v1(-19.44,1076.96) v1(-19.44,1130.23) v1(-19.44,1183.5) v1(-19.44,1236.77) v1(-19.44,1290.04) v1(-19.44,1343.31) v1(-19.44,1396.58) v1(-19.44,1449.85) v1(-19.44,1503.11) v1(-19.44,1556.38) v1(-19.44,1609.65) -19.44,1662.92 v1(-19.59,1663.07) -21.47,1664.95 -399.41,1664.95 ccw(c-398.28,1586.56) -476.66,1585.43
  other v1: -454.46,42.59 -142.67,64.84 -89.4,64.84 -476.99,87.52 -142.67,118.11 -89.4,118.11 -476.99,140.79 -142.67,171.38 -89.4,171.38 -477.25,194.18 -89.4,224.65 -486.61,238.15 -511.11,276.85 -89.4,277.92 -546.62,300.59 -89.4,331.19 -1554.04,333.97 -1020,360 -966.73,360 -913.46,360 -860.19,360 -89.4,384.46 -89.4,437.73 -89.4,491 -483.79,500.69 -631.64,530.33 -483.79,536.52 -142.67,544.27 -89.4,544.27 -1245.91,562.56 -612.7,570.28 -483.79,572.34 -1242.44,608.61 -1216.45,639.02 -563.25,679.27 -1230.48,680.08 -1267.67,701.17 -542.24,720.47 -1230.48,774.73 -1036.11,790 -982.84,790 -929.57,790 -876.3,790 -823.04,790 -466.53,790.11 -1267.67,795.82 -142.67,810.61 -89.4,810.61 -1171.04,815.26 -1122.36,816.75 -483.32,827.64 -430.06,827.64 -1215.34,840.35 -876.3,843.27 -823.04,843.27 -497.85,864.45 -142.67,863.88 -89.4,863.88 -446.85,865.17 -393.58,865.17 -876.3,896.54 -823.04,896.54 -461.37,901.98 -408.1,901.98 -354.83,901.98 -1319.22,930.43 -1145.48,937.67 -424.89,939.51 -371.62,939.51 -911.21,943.45 -884.01,943.45 -854.43,943.45 -1145.48,960.88 -249.21,970.42 -1145.48,984.09 -1020.74,1007.21 -551.64,1015.99 -1253.25,1032.67 -774.91,1041.23 -551.64,1044.57 -1056.16,1050.41 -859.58,1054.89 -836.37,1054.89 -813.17,1054.89 -980.91,1076.16 -142.67,1089.96 -89.4,1089.96 -530.01,1098.03 -776.82,1110.22 -1299.32,1114.61 -552.38,1121.35 -1362.41,1140.31 -1326.45,1140.31 -1362.41,1187.55 -1326.45,1187.55 -142.67,1196.5 -89.4,1196.5 -821.75,1217.13 -871.6,1218.2 -1088.1,1265.4 -1034.83,1265.4 -981.56,1265.4 -928.29,1265.4 -875.02,1265.4 -821.75,1265.4 -768.49,1265.4 -142.67,1303.04 -89.4,1303.04 -1553.96,1348.55 -1499.4,1371.22 -1446.13,1371.22 -1392.86,1371.22 -1339.59,1371.22 -1286.32,1371.22 -1233.05,1371.22 -1179.78,1371.22 -1126.51,1371.22 -1073.24,1371.22 -1019.97,1371.22 -966.7,1371.22 -913.44,1371.22 -860.17,1371.22 -806.9,1371.22 -753.63,1371.22 -700.36,1371.22 -547.55,1381.22 -510.92,1405.52 -142.67,1409.58 -89.4,1409.58 -485.6,1443.4 -476.72,1541.86 -476.72,1595.13 -451.63,1642.46 -397.07,1665.13 -343.8,1665.13 -290.53,1665.13 -237.26,1665.13 -183.99,1665.13 -130.72,1665.13 -77.45,1665.13
GSK: C14.1 C15.2 U1.8 | length 120.6
  Top Layer w8: U1.8 -1322.17,741.23 v1(-1321.5,740.56)
  Bottom Layer w10: v1(-1321.5,740.56) -1321.46,740.52 C14.1 -1277.75,740.52 -1272.59,735.36 C15.2
HSYNC: U1.23 U4.3 | length 173.9
  Top Layer w4: U1.23 -676.58,591.23 -650.21,617.59 -650.21,635.8 v1(-650.66,636.25)
  Bottom Layer w4: v1(-650.66,636.25) -650.66,654.16 -626.74,678.09 -614.68,678.09 U4.3
"HSYNC C": J1.6 U4.12 | length 488.6
  Bottom Layer w4: U4.12 -451.68,678.09 -430.58,656.99 -430.58,433.73 -344.72,347.87 J1.6@-282.38,347.87
I2CAD: R9.1 R12.2 U1.14 | length 146.1
  Top Layer w5: U1.14 -1196.64,561.7 -1184.83,573.51 v1(-1161.42,573.5)
  Bottom Layer w5: R12.2 R9.1 v1(-1161.42,573.5)
MC: J2.8 U1.30 | length 644.8
  Top Layer w5: U1.30 -672.56,941.23 -579.83,1033.96 -579.83,1121.89 -355.05,1346.67 J2.8
NetC30_1: C30.1 U7.2 | length 54.9
  Bottom Layer w10: U7.2 -837.76,998.73 -825.01,985.99 C30.1
NetL1_2: L1.2 U5.5 | length 43.5
  Bottom Layer w8: U5.5 -966.43,898.14 L1.2
NetR1_2: R1.2 R13.1 U6.2 | length 68.6
  Bottom Layer w10: R13.1 R1.2 -1222.23,960.88 U6.2
NetR5_1: R5.1 R6.1 U5.3 | length 92.1
  Bottom Layer w8: R6.1 -1038.26,844.69 -1047.75,854.19 R5.1 -1023.81,869.75 U5.3@-1010.96,882.6
NRST: J1.8 U1.16 | length 910.9
  Top Layer w4: U1.16 -1096.64,459.22 -1070.11,432.68 -732.41,432.68 -685.19,479.9 -379.9,479.9 -347.87,447.87 J1.8 ; J1.8@-283.96,450 J1.8@-275.71,450
PSYNC: U1.22 U4.2 | length 301.2
  Top Layer w4: U1.22 -781.54,501.12 -703.43,501.12 -652.33,552.22 v1(-652.33,588.57) v1@-652.33,592.57
  Bottom Layer w4: v1(-652.33,588.57) -652.33,602.11 -605.82,648.62 U4.2
"PSYNC C": J1.4 U4.13 | length 520.9
  Bottom Layer w4: U4.13 -462.53,658.4 -449.42,645.29 -449.42,419.78 -294.78,265.14 J1.4
SCL: Q1.2 R10.1 U1.20 | length 271.8
  Top Layer w5: U1.20 -896.64,573.11 -873.36,596.39 v1(-834.83,596.39)
  Bottom Layer w5: v1(-834.83,596.39) -778.08,596.39 -735.58,596.39 -714.31,617.66 R10.1
SCL_A: J1.1 Q1.3 R11.1 | length 1022.1
  Bottom Layer w5: R11.1 -863.52,631.83 -861.55,633.79 -861.55,631.83 -861.55,573.11 -789.55,501.12 -551.5,501.12 -473.01,422.62 -473.01,341.4 -332.1,200.49 -216.24,200.49 -194.78,179.03 J1.1
SDA: Q2.2 R14.1 U1.19 | length 217.2
  Top Layer w5: v1(-946.89,575.33) -946.64,575.08 U1.19
  Bottom Layer w5: Q2.2 -955.06,596.39 R14.1 -955.06,583.49 v1(-946.89,575.33)
SDA_B: J1.2 Q2.3 R15.1 | length 1136.8
  Bottom Layer w5: R15.1 -1103.15,631.83 Q2.3 -1101.18,604.48 -980.73,484.03 -559.18,484.03 -498.43,423.28 -498.43,321.99 -324.31,147.87 J1.2
SEQ: J1.7 U1.15 | length 1091.8
  Top Layer w5: U1.15 -1146.64,462.79 -1094.8,410.94 -724.66,410.94 -675.15,460.46 -423.29,460.46 -363.3,400.46 -242.19,400.46 J1.7
VBUS: C12.1 C13.2 U1.5 | length 115.2
  Top Layer w8: U1.5 -1322.69,891.23 v1(-1320.96,888.91)
  Bottom Layer w8: v1(-1320.96,888.91) -1304.2,888.91 C13.2@-1302.12,886.83
  Bottom Layer w10: C13.2@-1302.12,886.83 -1298.17,882.87 -1298.17,846.53 C12.1
VRIN: C23.2 U1.42 | length 24.3
  Bottom Layer w20: C23.2@-1187.42,1093.02 v1@-1187.42,1117.32
  other v1: -1187.91,1117.32
VSYNC: U1.24 U4.4 | length 153.9
  Top Layer w4: U1.24 -673.18,641.23 -650.97,663.43 v1(-650.97,680.76)
  Bottom Layer w4: v1(-650.97,680.76) -650.97,688.52 -642.95,696.54 -641.72,697.77 U4.4
"VSYNC C": J1.5 U4.11 | length 592.5
  Bottom Layer w4: U4.11 -484.69,697.77 -438.26,697.77 -423.97,683.48 -411.42,670.92 -411.42,448.66 -360.62,397.87 -244.78,397.87 J1.5@-188.6,341.69
pads on no net: J1.3 U1.1 U1.2 U1.6 U1.7 U1.9 U1.12 U1.17 U1.18 U1.21 U1.31 U1.36 U1.37 U1.39 U1.40 U1.41 U6.5

## Polygon pours and split planes (outlines as drawn)
1.8V on Bottom Layer "NONET_L-01_P-001" (solid, pour order 144): -679.15,941.46 -671,949.6 -671,960.39 -671,1111.82 -683.81,1124.63 -723.99,1124.63 -734.47,1114.15 -734.47,1029.4 -718.36,1013.3 -699.32,1013.3 -692.55,1006.53 -692.55,972.75 -701.44,963.87 -789.32,963.87 -798.16,955.03 -798.16,941.46
4.2V on Bottom Layer "NONET_L-01_P-001" (solid, pour order 142): -1077.74,1010.28 -1066.7,999.23 -1055.62,999.23 -1037.91,981.53 -1037.91,904.2 -1042.83,899.28 -1072.65,899.28 -1092.33,879.6 -1129.99,879.6 -1137.64,887.24 -1137.64,908.95 -1133.74,912.85 -1122.47,912.85 -1115.96,919.37 -1115.96,942.18 -1086.76,942.18 -1084,944.94 -1084,975.19 -1088.39,979.59 -1115.96,979.59 -1115.96,993.36 -1115.83,993.36 -1115.96,993.49 -1115.96,1012.86 -1107.46,1021.36 -1088.82,1021.36
GND on Bottom Layer "NONET_L-01_P-001" (solid, remove dead copper, pour order 147): -476.07,1488.53 -476.07,1481.11 cw(c-576.07,1481.11) -505.36,1410.4 -515.33,1400.44 cw(c-586.04,1471.15) -586.04,1371.15 -1498.79,1371.15 ccw(c-1498.79,1294.15) -1553.24,1348.59 -1553.36,1348.48 ccw(c-1498.95,1294.07) -1575.89,1294.07 -1575.89,388.22 ccw(c-1498.9,388.22) -1553.34,333.78 ccw(c-1498.57,388.55) -1498.57,311.09 -586.31,311.09 cw(c-586.31,211.09) -515.6,281.8 -505.68,271.88 cw(c-576.39,201.17) -476.39,201.17 -476.39,97.11 ccw(c-398.79,97.11) -453.66,42.24 ccw(c-399.29,96.62) -399.29,19.72 -285.39,19.72 -18.7,19.65 -18.7,1662.72 -21.04,1665.06 -396.46,1665.06 ccw(c-396.46,1588.05) -450.91,1642.5 -451.03,1642.39 ccw(c-390.46,1581.82) -476.11,1581.82 -476.11,1488.67
3.3V on Bottom Layer "NONET_L-01_P-001" (solid, pour order 141): -951.67,958.29 -951.67,974.4 -939.6,986.47 -896.94,986.47 -884.01,999.4 -884.01,1020.41 -914.54,1050.93 -914.54,1073.99 -904.13,1084.4 -856.46,1084.4 -856.46,1111.87 -852.41,1115.92 -823,1115.92 -819.05,1111.97 -819.05,1084.4 -805.28,1084.4 -805.28,1120.8 -826.06,1141.58 -908.45,1141.58 -944.4,1105.64 -944.4,1027.56 -959.5,1012.46 -987.1,1012.46 -1007.45,992.11 -1007.45,936.98 -1000.3,929.82 -945.16,929.82 -933.38,918.04 -933.38,893.2 -940.34,886.24 -966.6,886.24 -966.6,864.59 -956.55,854.54 -913.39,854.54 -911.21,856.71 -911.21,917.84
3.6V on Bottom Layer "NONET_L-01_P-001" (solid, pour order 143): -1175.01,942.18 -1198.63,942.18 -1261.18,942.18 -1280.79,961.79 -1280.79,1049.94 -1286.36,1055.5 -1361.87,1055.5 -1391.18,1084.81 -1391.18,1186.51 -1372.1,1205.6 -1286.35,1205.6 -1267.67,1186.92 -1267.67,1092.01 -1254.15,1078.49 -1229.48,1078.49 -1216.44,1091.53 -1216.44,1218.13 -1256.56,1258.25 -1391.16,1258.25 -1440.34,1209.06 -1440.34,484.74 -1401.54,445.94 -1322.18,445.94 -1285.43,482.68 -1285.43,612.05 -1295.26,621.88 -1354.04,621.88 -1361.87,629.71 -1361.87,920.78 -1338.54,944.11 -1291.64,944.11 -1259.44,911.92 -1259.44,890.92 -1245.16,876.63 -1164.35,876.63 -1157.37,883.59 -1157.37,908.46 -1163.16,914.24 -1170.98,914.24 -1175.01,918.27
3.3V on Bottom Layer "NONET_L-01_P-001" (solid, pour order 103): -596.23,909.51 -582.77,922.96 -582.77,934.62 -577.71,939.69 -572.71,939.69 -569.2,943.19 -569.2,986.97 -559.75,986.97 -559.75,939.69 -559.75,921.48 -552.66,914.38 -539.19,914.38 -531.27,906.46 -531.27,882.62 -540.1,873.8 -587.81,873.8 -596.23,882.22
3.3V on Bottom Layer "NONET_L-01_P-001" (solid, pour order 92): -559.75,654.46 -559.18,653.89 -559.18,583.6 -553.26,577.67 -524.01,577.67 -519.99,573.65 -519.99,547.87 -531.18,536.67 -591.43,536.67 -591.43,606.32 -569.2,628.54 -569.2,654.46
3.3V on Bottom Layer "3.3V_L04_P110" (solid, pour order 110): -379.68,1620.47 -386.69,1613.47 -386.69,1528.8 -378.23,1520.34 -89.4,1520.34 -89.4,1606.47 -103.4,1620.47
3.3V on Bottom Layer "3.3V_L04_P112" (solid, pour order 112): -403.4,705.47 -388.4,720.47 -103.4,720.47 -89.4,706.47 -89.4,645.41 -114.46,620.34 -373.07,620.34 -403.4,650.68
GND on Drill Guide "GND_L02_P082" (solid, remove dead copper, pour order 82): -446.66,1637.67 ccw(c-446.66,1607.86) -467.74,1628.94 -470.55,1626.13 ccw(c-442.98,1598.56) -481.97,1598.56 -481.97,1439.02 cw(c-539.71,1439.03) -498.79,1398.3 -504.74,1392.35 cw(c-536.16,1423.78) -536.16,1379.34 -1497.17,1379.34 ccw(c-1497.17,1289.21) -1560.9,1352.94 ccw(c-1503.42,1295.46) -1584.7,1295.46 -1584.7,382.18 ccw(c-1484.7,382.18) -1555.41,311.46 -1554.6,310.65 ccw(c-1509.85,355.4) -1509.85,292.12 -1430.4,292.12 ccw(c-1429.43,293.09) -1429.43,291.71 -542.03,291.71 cw(c-542.03,233.52) -500.88,274.67 -496.67,270.46 cw(c-531.16,235.97) -482.39,235.97 -482.39,101.91 ccw(c-432.95,101.91) -467.91,66.95 ccw(c-446.26,88.6) -446.26,57.98 -45,57.98 -45,1629.31 -44.98,1629.33 -44.98,1637.67
GND on Top Layer "NONET_L-01_P-001" (solid, remove dead copper, pour order 148): -476.34,1488.53 -476.34,1481.11 cw(c-576.34,1481.11) -505.63,1410.4 -515.6,1400.44 cw(c-586.31,1471.15) -586.31,1371.15 -1499.06,1371.15 ccw(c-1499.06,1294.15) -1553.51,1348.59 -1553.63,1348.48 ccw(c-1499.22,1294.07) -1576.16,1294.07 -1576.16,388.22 ccw(c-1499.17,388.22) -1553.61,333.78 ccw(c-1498.84,388.55) -1498.84,311.09 -586.58,311.09 cw(c-586.58,211.09) -515.87,281.8 -505.94,271.88 cw(c-576.65,201.17) -476.65,201.17 -476.65,97.11 ccw(c-399.06,97.11) -453.93,42.24 ccw(c-399.56,96.61) -399.56,19.72 -285.66,19.72 -18.97,19.65 -18.97,1662.72 -21.31,1665.06 -396.73,1665.06 ccw(c-396.73,1588.05) -451.18,1642.5 -451.29,1642.39 ccw(c-390.73,1581.82) -476.38,1581.82 -476.38,1488.66
3.6V on Top Layer "MM" (solid, pour order 106): -1324.08,1027.53 -1294.74,1027.53 -1277.96,1010.75 -1277.96,976.02 -1295.02,958.96 -1436.53,958.96 -1436.53,632.67 -1425.74,621.88 -1285.43,621.88 -1278.44,614.88 -1278.44,573.51 -1291.35,560.6 -1313.45,560.6 -1313.45,475.65 -1481.71,475.65 -1519.13,513.08 -1519.13,1156.5 -1410.23,1265.4 -1230.75,1265.4 -1216.44,1251.09 -1216.44,1097.26 -1224.37,1089.34 -1260.99,1089.34 -1272.7,1101.04 -1272.7,1210.49 -1280.34,1218.13 -1359.57,1218.13 -1427.18,1150.51 -1427.18,1034.59 -1411.01,1018.42 -1333.19,1018.42
VRIN on Top Layer "NONET_L-01_P-001" (solid, pour order 99): -1184.83,1126.98 -1173.06,1126.98 -1166.33,1120.25 -1166.33,1096.74 -1173.5,1089.58 -1201.06,1089.58 -1208.49,1097.01 -1208.45,1126.86 -1208.45,1205.6 -1184.83,1205.6
1.8V on Top Layer "NONET_L-01_P-001" (solid, remove dead copper, pour order 90): -761.01,1079.41 -682.27,1079.41 -682.27,1124.63 -761.01,1124.63
4.2V on PWR "NONET_L-01_P-001" (solid, pour order 87): -1040.23,1079.23 -1040.23,869.49 -1047.75,861.97 -1134.83,861.97 -1134.83,960.7 -1138.67,964.54 -1138.67,1096.74 -1057.74,1096.74
3.3V on PWR "NONET_L-01_P-001" (solid, pour order 86): -536.07,329.75 -449.56,243.24 -449.56,70.69 -424.76,45.89 -79.51,45.89 -69.72,55.69 -69.72,1586.79 -101.6,1618.67 -421.46,1618.67 -446.96,1593.18 -446.96,1414.48 -492.32,1369.12 -492.32,1263.5 -539.89,1215.93 -631.91,1215.93 -698.19,1282.22 -698.19,1329.09 -717.6,1348.5 -1001.03,1348.5 -1025.45,1324.08 -1025.45,351.14 -1004.13,329.82
3.6V on PWR "NONET_L-01_P-001" (solid, pour order 131): -1025.45,847.19 -1040.23,861.97 -1134.83,861.97 -1138.67,865.81 -1138.67,1096.74 -1030.86,1096.74 -1025.45,1102.15 -1025.45,1324.08 -1049.9,1348.53 -1541.88,1348.53 -1551.94,1338.48 -1551.94,509.94 -1551.94,359.41 -1521.94,329.42 -1057.99,329.42 -1025.45,361.95
1.8V on PWR "/" (solid, pour order 70): -557.33,865.17 -635.89,865.17 -772.7,1001.97 -804.53,1001.97 -821.77,984.73 -821.77,953.19 -802.28,933.71 -771.97,933.71 -620.58,782.32 -620.58,620.58 -600.44,600.43 -508.26,600.43 -498.28,610.41 -498.28,965.71 -508.92,976.35 -530.11,976.35 -540.07,966.39 -540.07,882.43
GND on GND "NONET_L-01_P-001" (solid, pour order 145): -476.68,1488.61 -476.68,1481.19 cw(c-576.67,1481.18) -505.97,1410.47 -515.93,1400.51 cw(c-586.64,1471.22) -586.64,1371.22 -1499.4,1371.22 ccw(c-1499.4,1294.22) -1553.85,1348.67 -1553.96,1348.55 ccw(c-1499.56,1294.14) -1576.5,1294.14 -1576.5,388.29 ccw(c-1499.51,388.29) -1553.95,333.85 ccw(c-1499.18,388.62) -1499.18,311.16 -586.91,311.16 cw(c-586.91,211.17) -516.2,281.88 -503.17,268.84 cw(c-565.67,205.93) -476.99,205.93 -476.99,97.18 ccw(c-399.4,97.18) -454.27,42.32 ccw(c-399.89,96.69) -399.89,19.79 -286,19.79 -19.31,19.72 -19.31,1664.01 -383.98,1664.01 ccw(c-397.07,1588.14) -451.51,1642.57 -451.63,1642.46 ccw(c-391.07,1581.9) -476.72,1581.89 -476.72,1488.74

## Other copper
Top Layer:
  pour cut-out: -769.01,931.89 -769.01,811.04 -761.01,803.04 -682.27,803.04 -682.27,929.42
  pour cut-out: -1213.45,471.86 -1145.12,403.52 -1103.09,403.52 -1164.21,464.64
  pour cut-out: -379.9,487.03 -175.01,487.03 -162.81,474.83 -162.81,352.87 -178.09,337.59 -311.24,337.59 -426.46,452.81
  pour cut-out: -1416.74,979.42 -1436.86,959.29 -1431.06,953.5 -1332.27,953.5 -1332.27,979.42
  pour cut-out: -1293.48,890.62 -1293.48,627.29 -1309.63,643.44 -1307.5,645.57 -1307.5,895.83 -1314.71,903.04 -1324.08,903.04 -1411.01,903.04 -1431.12,923.14 -1431.12,953.55 -1411.53,953.55 -1411.01,953.04 -1411.01,929.42 -1332.27,929.42
  pour cut-out: -645.19,580.38 -645.73,579.83 -645.73,519.18 -610.99,484.44 -610.99,487.08 -640.13,516.23 -640,516.36 -640,574.23 -631.71,582.52 -631.71,734.09 -645.97,734.09 -645.19,733.31
Bottom Layer:
  pour cut-out: -644.53,932.31 -592.3,932.31 -577.2,947.4 -577.2,975.23 -580.08,978.1 -584.86,978.1
  region net 1.8V: -819.05,1001.01 -809.64,991.59 -809.64,970.77 -790.45,951.58 -753.91,951.58 -753.91,996.83 -782.42,1025.34 -819.05,1025.34
  region net 1.8V: -531.51,986.97 -519.99,975.45 -519.99,924.66 -524.65,920 -546.63,920 -549.52,922.88 -549.52,986.97
  pour cut-out: -204.37,748.54 -181.71,725.88 -229.03,725.88 -229.2,726.05 -229.2,1014.7 -204.37,1014.7
  pour cut-out: -754.04,936.06 -782.62,907.47 -782.62,935.65 -783.01,936.04
  pour cut-out: -834.83,747.16 -826.18,747.16 -803.41,769.94 -803.41,777.61 -803.57,777.77 -834.18,747.16
  pour cut-out: -477.22,459.73 -469.56,459.73 -459.25,470.04 -487.53,470.04 -517.76,500.27 -517.76,540.81 -543.74,509.84 -484.03,450.13 -467.62,450.13
  pour cut-out: -644.37,732.53 -620.17,756.74 -620.17,730.55 -632.89,717.83 -632.89,583.49 -645.22,571.15 -658.95,571.15 -669.37,581.58 -669.37,721.02 -657.86,732.53
  pour cut-out: -1079.43,871.12 -1137.76,871.12 -1134.7,874.18 -1090.09,874.18 -1070.41,893.87 -1066.47,889.93 -1066.47,871.25 -990.6,864.87 -966.88,864.87 -956.55,854.54 -913.39,854.54 -913.39,849.12 -958.79,849.12 -967.53,857.87 -986.1,857.87 -991.88,852.09 -991.88,840.58 -1002.8,829.66 -1038.06,829.66 -1059.36,851.05
  pour cut-out: -1280.02,612.05 -1279.85,612.05 -1269.97,622.15 -1246.76,622.15 -1235.24,633.68 -1235.24,655.6 -1245.76,666.11 -1334.59,666.11 -1356.32,687.84 -1356.32,632.09 -1356.46,631.95 -1350.18,625.67 -1330.7,625.67 -1280.02,625.67
  pour cut-out: -1245.76,760.76 -1235.24,750.24 -1235.24,728.32 -1243.24,720.32 -1321.06,720.32 -1327.3,726.56 -1335.57,734.84 -1335.57,746.27 -1321.09,760.76
  pour cut-out: -1283.03,873.5 -1276.72,867.19 -1276.72,832.55 -1284.18,825.08 -1309.74,825.08 -1317.21,832.55 -1317.21,861.83 -1328.88,873.5 -1336.09,880.71 -1336.09,896.43 -1329.07,903.44 -1290.63,903.44 -1283.03,895.84
  pour cut-out: -343.4,967.02 -302.58,926.2 -204.26,926.2 -164.37,966.09 -164.37,1364.58 -181.43,1381.64 -344.67,1381.64 -420.54,1305.77 -420.54,1043.28 -496.8,967.02
  pour cut-out: -1199.71,618.6 -1199.71,699.88 -1195.03,695.2 -1195.03,620.18 -1193.24,618.6 -1130.05,555.41 -1233.07,555.41 -1237,559.34 -1237,581.31
  pour cut-out: -1217.04,555.41 -1062.93,555.41 -1066.56,559.05 -1170.93,559.05
  pour cut-out: -583.1,1079.38 -583.1,1126 -627.55,1170.45 -627.55,1114.93 -593.42,1080.81
  pour cut-out: -644.81,1128.12 -728.16,1128.12 -667.19,1189.08 -646.19,1189.08 -631.28,1174.17 -627.55,1170.45 -627.55,1145.37
  pour cut-out: -903.78,750.15 -905.91,748.02 -1151.79,748.02 -1197.08,702.73 -1197.08,693.62 -1164.05,726.64 -947.18,726.64 -936.86,736.97
  pour cut-out: -626.78,512.15 -624.11,512.15 -599.58,536.67 -599.58,514.46 -602.22,511.82
  pour cut-out: -783.01,768.37 -783.01,764.67 -713.74,695.39 -704.79,688.87 -704.94,614.08 -704.42,613.56 -732.3,585.69 -745.65,585.69 -756.82,574.52 -756.82,511.82 -669.32,511.82 -696.22,538.72 -696.22,681.57
  pour cut-out: -488.72,640.25 -459.69,640.25 -459.25,640.69 -464.23,645.68 -483.29,645.68
  pour cut-out: -1198.63,979.59 -1175.37,979.59 -1167.1,971.32 -1167.14,971.28 -1167.14,927.42 -1159.71,927.42 -1137.64,905.35 -1137.76,905.22 -1137.76,871.12 -1187.37,871.12 -1162.19,871.12 -1151.96,881.35 -1151.96,908.45 -1164.02,920.52 -1169.6,920.52 -1169.6,967.49 -1174.88,972.77 -1196.72,972.77 -1198.53,972.77 -1214.93,989.18 -1214.93,997.75 -1234.28,997.75 -1239.42,992.61 -1239.42,954.94 -1247.96,946.4 -1253.87,946.4 -1263.12,955.66 -1263.12,955.68 -1250.45,955.68 -1243.28,962.85 -1243.28,991.87 -1243.36,991.87 -1243.36,1000.14 -1237.54,1005.95 -1214.9,1005.95 -1198.63,989.68
  pour cut-out: -480.74,746.86 -449.83,746.86 -446.7,743.74
  pour cut-out: -526.17,1079.38 -473.81,1079.38 -475.6,1077.58 -475.74,1077.58
  pour cut-out: -574.59,994.71 -574.59,986.97 -569.2,987.03 -523.69,987.03 -523.69,994.71
  pour cut-out: -514.55,949.27 -496.8,967.02 -514.42,967.02 -514.56,967.16
  pour cut-out: -168.56,106.98 -305.46,106.98 -329.72,131.25 -329.72,142.46 -327.84,142.46 -301.28,115.9 -168.56,115.9 -168.56,346.14 -162.81,351.89 -162.81,112.72
  pour cut-out: -514.58,917.74 -514.58,922.42 -521.67,915.33 -527.12,915.33 -525.86,906.46
  region net 1.8V: -549.49,592.41 -549.49,654.44 -549.52,654.46 -540.07,654.46 -529.83,644.23 -514.15,644.23 -510.15,640.23 -510.15,626.86 -525.36,611.64 -525.36,589.42 -527.3,587.49 -546.93,587.49 -549.48,590.04
  pour cut-out: -1165.95,970.16 -1122.64,970.16 -1122.64,969.65 -1123.13,969.17 -1164.95,969.17

## Silkscreen, mask and mechanical layers (free items; w line width, h text height)
Bottom Overlay:
  text "3V3" at -273.78,1588.67 h20
  text "3V3" at -172.18,1586.36 h20
  text "GND" at -271.84,1487.32 h20
  text "GND" at -171.24,1486.5 h20
  text "MC" at -282.11,1387.2 h20
  text "B5" at -178.5,1384.93 h20
  text "B6" at -281.14,1288.35 h20
  text "B4" at -179.5,1286.71 h20
  text "B2" at -179.69,1187 h20
  text "B3" at -282.2,1186.52 h20
  text "B0" at -181.13,1086.75 h20
  text "B1" at -287.84,1084.26 h20
  text "3V3" at -268.62,689.2 h20
  text "3V3" at -167.71,689.15 h20
  text "GND" at -168.01,589.2 h20
  text "GND" at -272.51,586.36 h20
  text "SEQ" at -169.1,488.46 h20
  text "NRST" at -264.81,487.02 h20
  text "IR_Sensor V1.0" at -761.78,421.11 h25
  text "HSYNC" at -265.2,389.81 h20
  text "VSYNC" at -146.38,389.15 h20
  text "PSYNC" at -263.23,287.12 h20
  text "SDA" at -270.4,189.08 h20
  text "SCL" at -168.73,188.47 h20
Top 3D Body:
  drawing of 311 lines, arcs and shapes, not listed
  text "Layer" at 593.86,569.73 h60
  text "Name" at 1003.78,569.73 h60
  text "Material" at 1933.52,569.73 h60
  text "Thickness" at 2793.29,569.73 h60
  text "Constant" at 3443.12,569.73 h60
  text "Board Layer Stack" at 4012.98,569.73 h60
  text "Top Overlay" at 1003.78,449.73 h60
  text "Top Solder" at 1003.78,329.73 h60
  text "Solder Resist" at 1933.52,329.73 h60
  text "0.40mil" at 2793.29,329.73 h60
  text "3.5" at 3443.12,329.73 h60
  text "1" at 593.86,209.73 h60
  text "Top Layer" at 1003.78,209.73 h60
  text "CF-001" at 1933.52,209.73 h60
  text "1.38mil" at 2793.29,209.73 h60
  text "Dielectric 2" at 1003.78,89.73 h60
  text "PP-006" at 1933.52,89.73 h60
  text "3.91mil" at 2793.29,89.73 h60
  text "4.1" at 3443.12,89.73 h60
  text "2" at 593.86,-30.27 h60
  text "GND" at 1003.78,-30.27 h60
  text "0.60mil" at 2793.29,-30.27 h60
  text "Dielectric1" at 1003.78,-150.27 h60
  text "FR-4" at 1933.52,-150.27 h60
  text "49.80mil" at 2793.29,-150.27 h60
  text "4.8" at 3443.12,-150.27 h60
  text "3" at 593.86,-270.27 h60
  text "PWR" at 1003.78,-270.27 h60
  text "0.60mil" at 2793.29,-270.27 h60
  text "Dielectric3" at 1003.78,-390.27 h60
  text "FR-4" at 1933.52,-390.27 h60
  text "3.91mil" at 2793.29,-390.27 h60
  text "4.29" at 3443.12,-390.27 h60
  text "4" at 593.86,-510.27 h60
  text "Bottom Layer" at 1003.78,-510.27 h60
  text "CF-004" at 1933.52,-510.27 h60
  text "1.38mil" at 2793.29,-510.27 h60
  text "Bottom Solder" at 1003.78,-630.27 h60
  text "Solder Resist" at 1933.52,-630.27 h60
  text "0.40mil" at 2793.29,-630.27 h60
  text "3.5" at 3443.12,-630.27 h60
  text "Bottom Overlay" at 1003.78,-750.27 h60
Drill Drawing:
  circle w10: c765.62,1570.83 r33.33
  lines w10: 732.29,1304.17 798.96,1304.17 765.62,1237.5 732.29,1304.17 ; 732.29,1387.5 798.96,1387.5 798.96,1454.17 732.29,1454.17 732.29,1387.5
  lines w15: 672.5,1192.5 11423.51,1192.5 ; 672.5,1642.5 11423.51,1642.5 ; 1223.38,1042.5 1223.38,1792.5 ; 1823.22,1042.5 1823.22,1792.5 ; 2912.9,1042.5 2912.9,1792.5 ; 3418.78,1042.5 3418.78,1792.5 ; 4152.58,1042.5 4152.58,1792.5 ; 5652.13,1042.5 5652.13,1792.5 ; 6241.98,1042.5 6241.98,1792.5 ; 6987.78,1042.5 6987.78,1792.5 ; 7857.53,1042.5 7857.53,1792.5 ; 8711.29,1042.5 8711.29,1792.5 ; 10044.9,1042.5 10044.9,1792.5 ; 672.5,1042.5 11423.51,1042.5 11423.51,1792.5 672.5,1792.5 672.5,1042.5
  text "Symbol" at 762.5,1687.5 h72
  text "Count" at 1268.38,1687.5 h72
  text "Hole Size" at 1868.22,1687.5 h72
  text "Plated" at 2957.9,1687.5 h72
  text "Hole Type" at 3463.78,1687.5 h72
  text "Drill Layer Pair" at 4197.58,1687.5 h72
  text "Via/Pad" at 5697.13,1687.5 h72
  text "Pad Shape" at 6286.98,1687.5 h72
  text "Template" at 7032.78,1687.5 h72
  text "Description" at 7902.53,1687.5 h72
  text "Hole Tolerance (+)" at 8756.29,1687.5 h72
  text "Hole Tolerance (-)" at 10089.9,1687.5 h72
  text "4" at 1268.38,1537.5 h60
  text "86.61mil (2.200mm)" at 1868.22,1537.5 h60
  text "PTH" at 2957.9,1537.5 h60
  text "Round" at 3463.78,1537.5 h60
  text "Top Layer - Bottom Layer" at 4197.58,1537.5 h60
  text "Pad" at 5697.13,1537.5 h60
  text "Rounded" at 6286.98,1537.5 h60
  text "c300h220m0mx0" at 7032.78,1537.5 h60
  text "24" at 1268.38,1387.5 h60
  text "40.16mil (1.020mm)" at 1868.22,1387.5 h60
  text "PTH" at 2957.9,1387.5 h60
  text "Round" at 3463.78,1387.5 h60
  text "Top Layer - Bottom Layer" at 4197.58,1387.5 h60
  text "Pad" at 5697.13,1387.5 h60
  text "Rounded" at 6286.98,1387.5 h60
  text "(Mixed)" at 7032.78,1387.5 h60
  text "265" at 1268.38,1237.5 h60
  text "11.81mil (0.300mm)" at 1868.22,1237.5 h60
  text "PTH" at 2957.9,1237.5 h60
  text "Round" at 3463.78,1237.5 h60
  text "Top Layer - Bottom Layer" at 4197.58,1237.5 h60
  text "Via" at 5697.13,1237.5 h60
  text "Rounded" at 6286.98,1237.5 h60
  text "(Mixed)" at 7032.78,1237.5 h60
  text "293 Total" at 1268.38,1087.5 h60

## Dimensions
-0.15,1682.66 to 0,0 on Top 3D Body
-1596.57,1293.98 to -0.15,1682.66 on Top 3D Body